# EAGLE board SparkFun_MicroMod_Function_ADIN1110-Panel_v10d (EAGLE 9.6.2), part 1 of 3
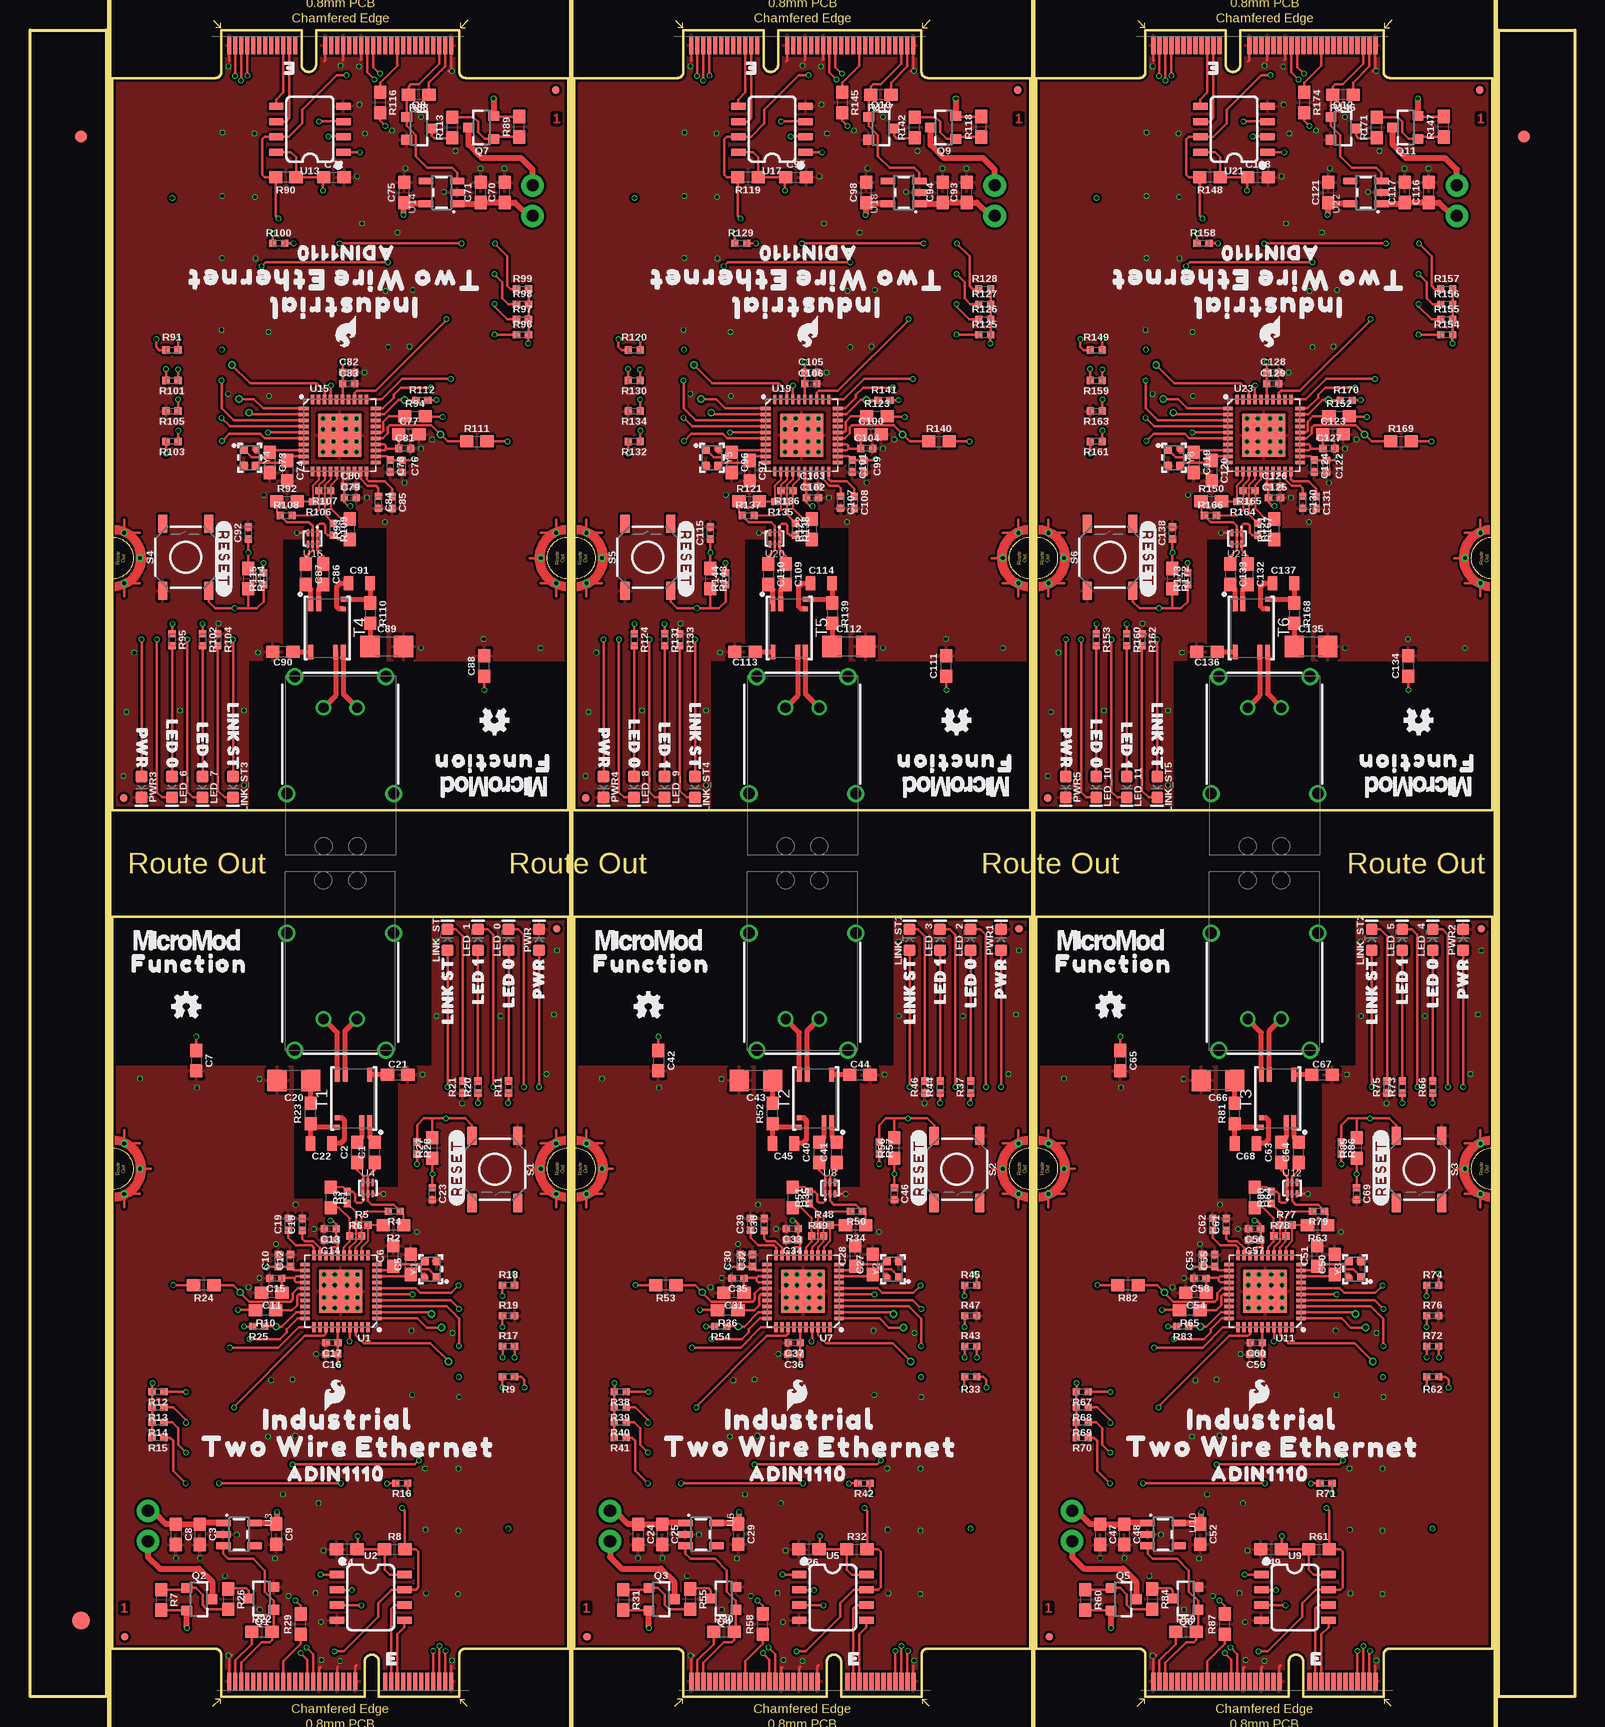
[diagram p0: board, top side]
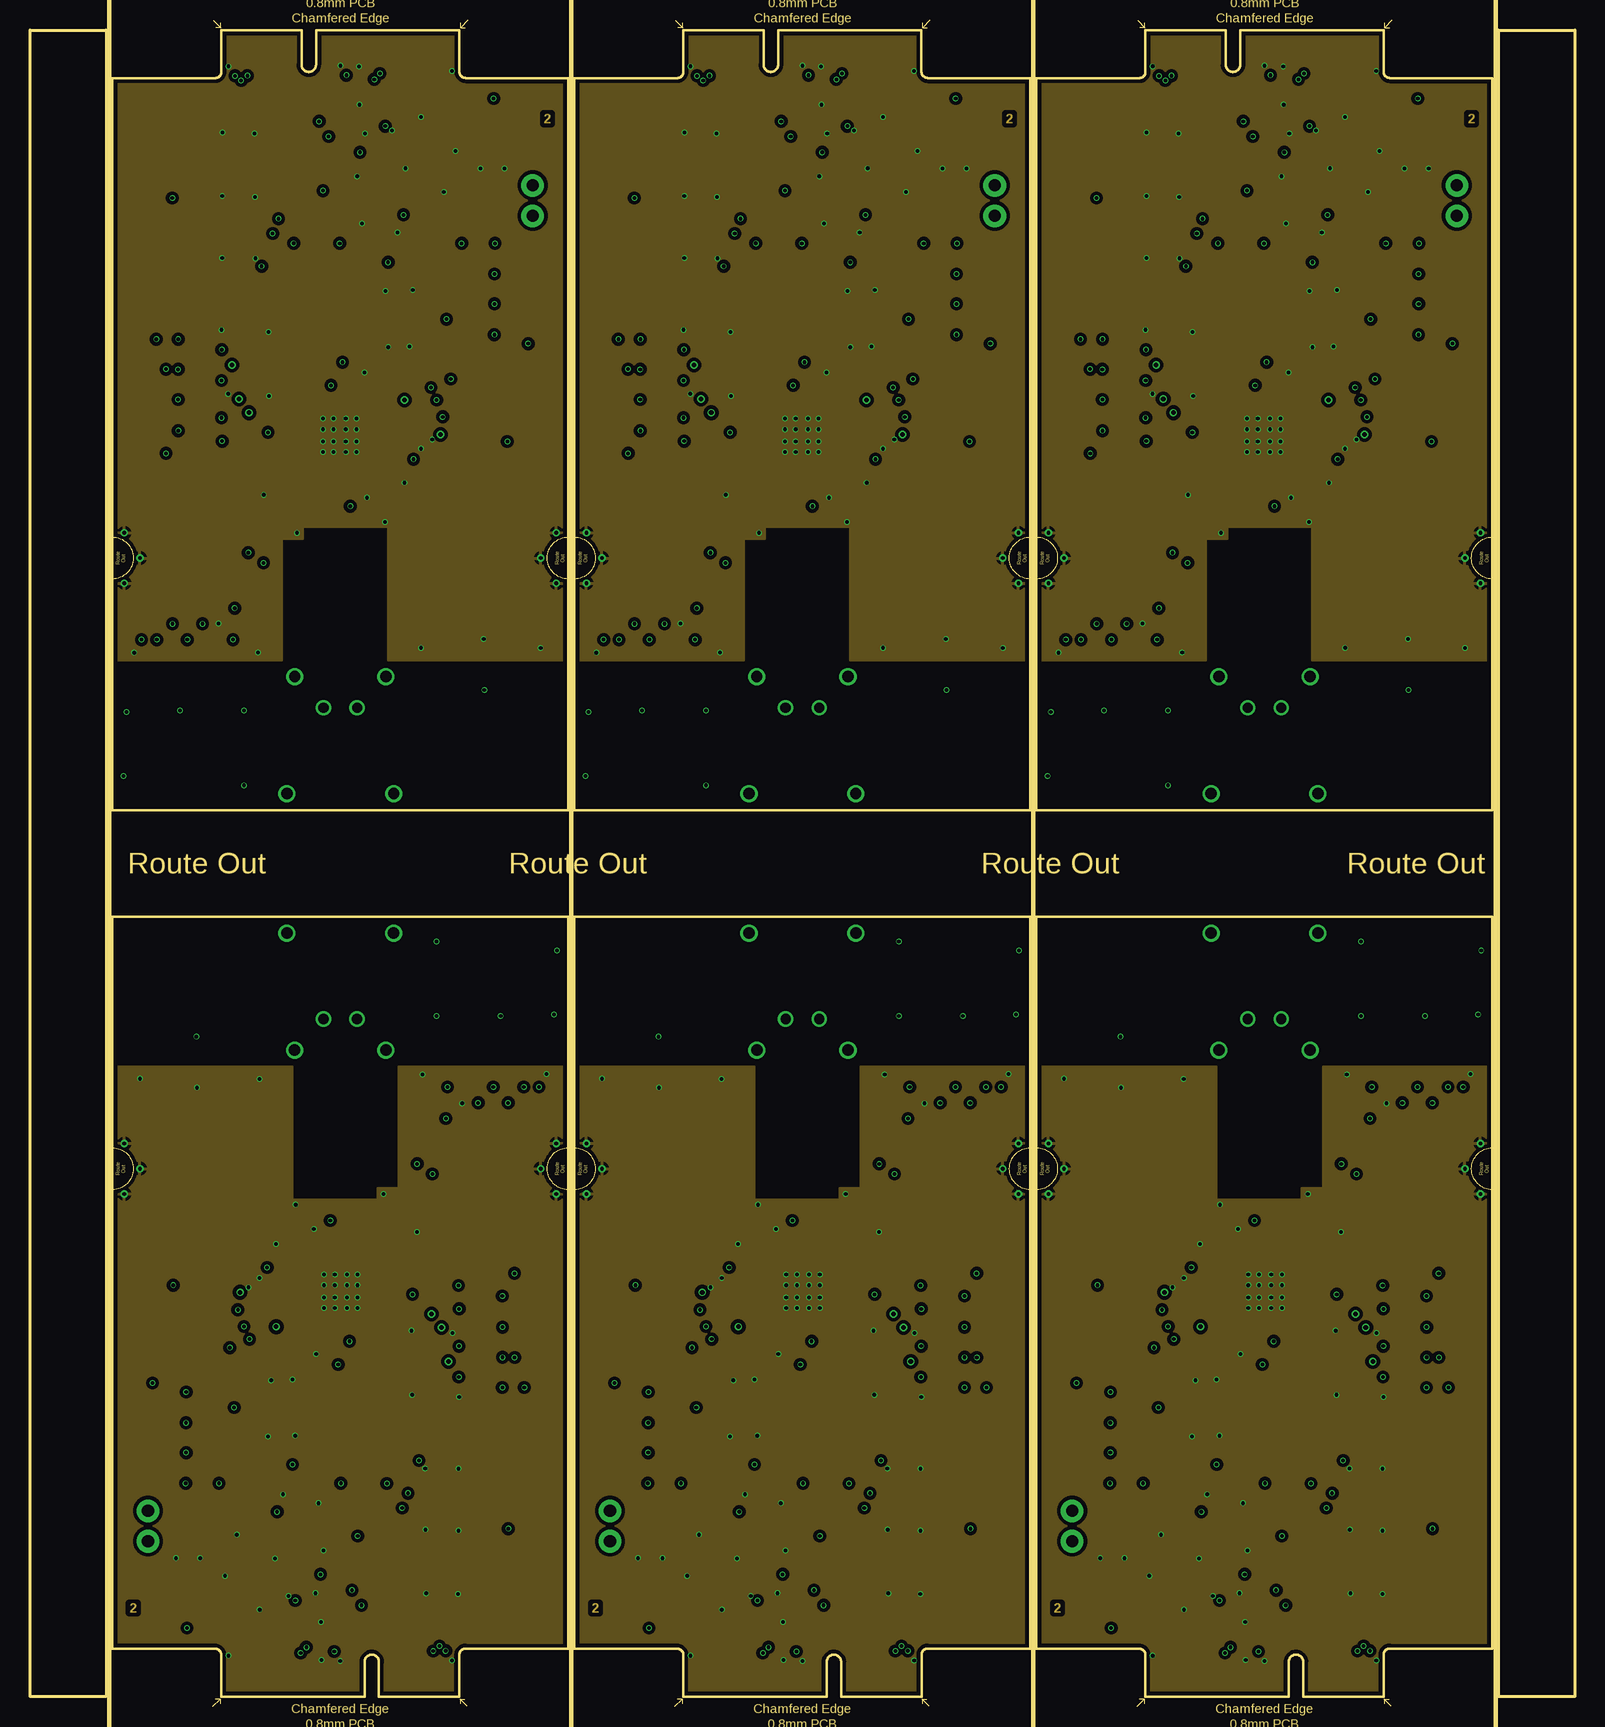
[diagram p1: board, inner layer Route2]
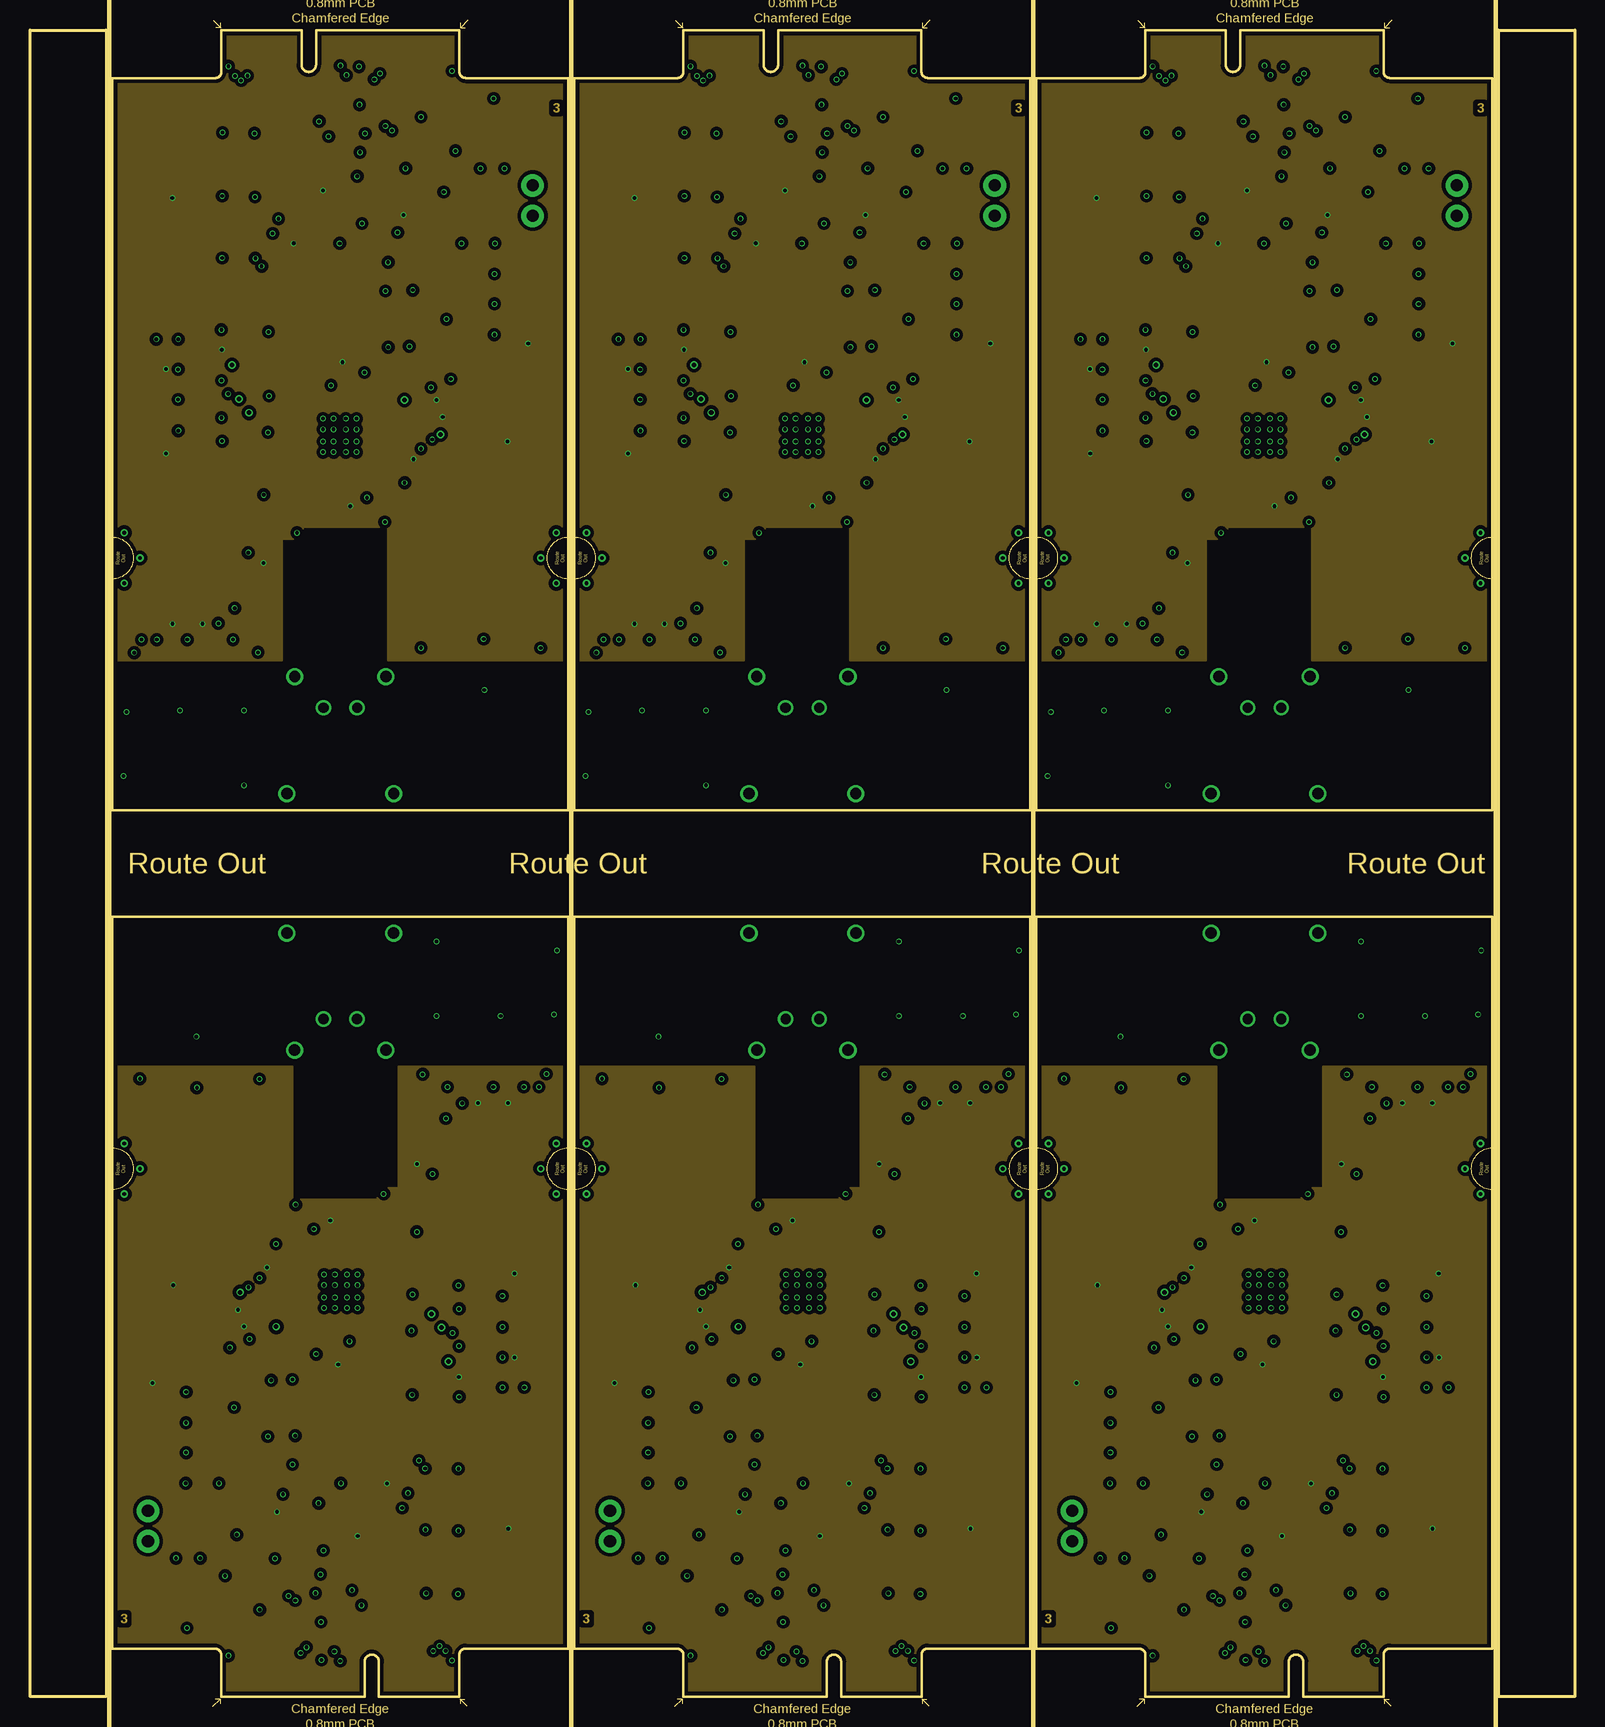
[diagram p2: board, inner layer Route15]
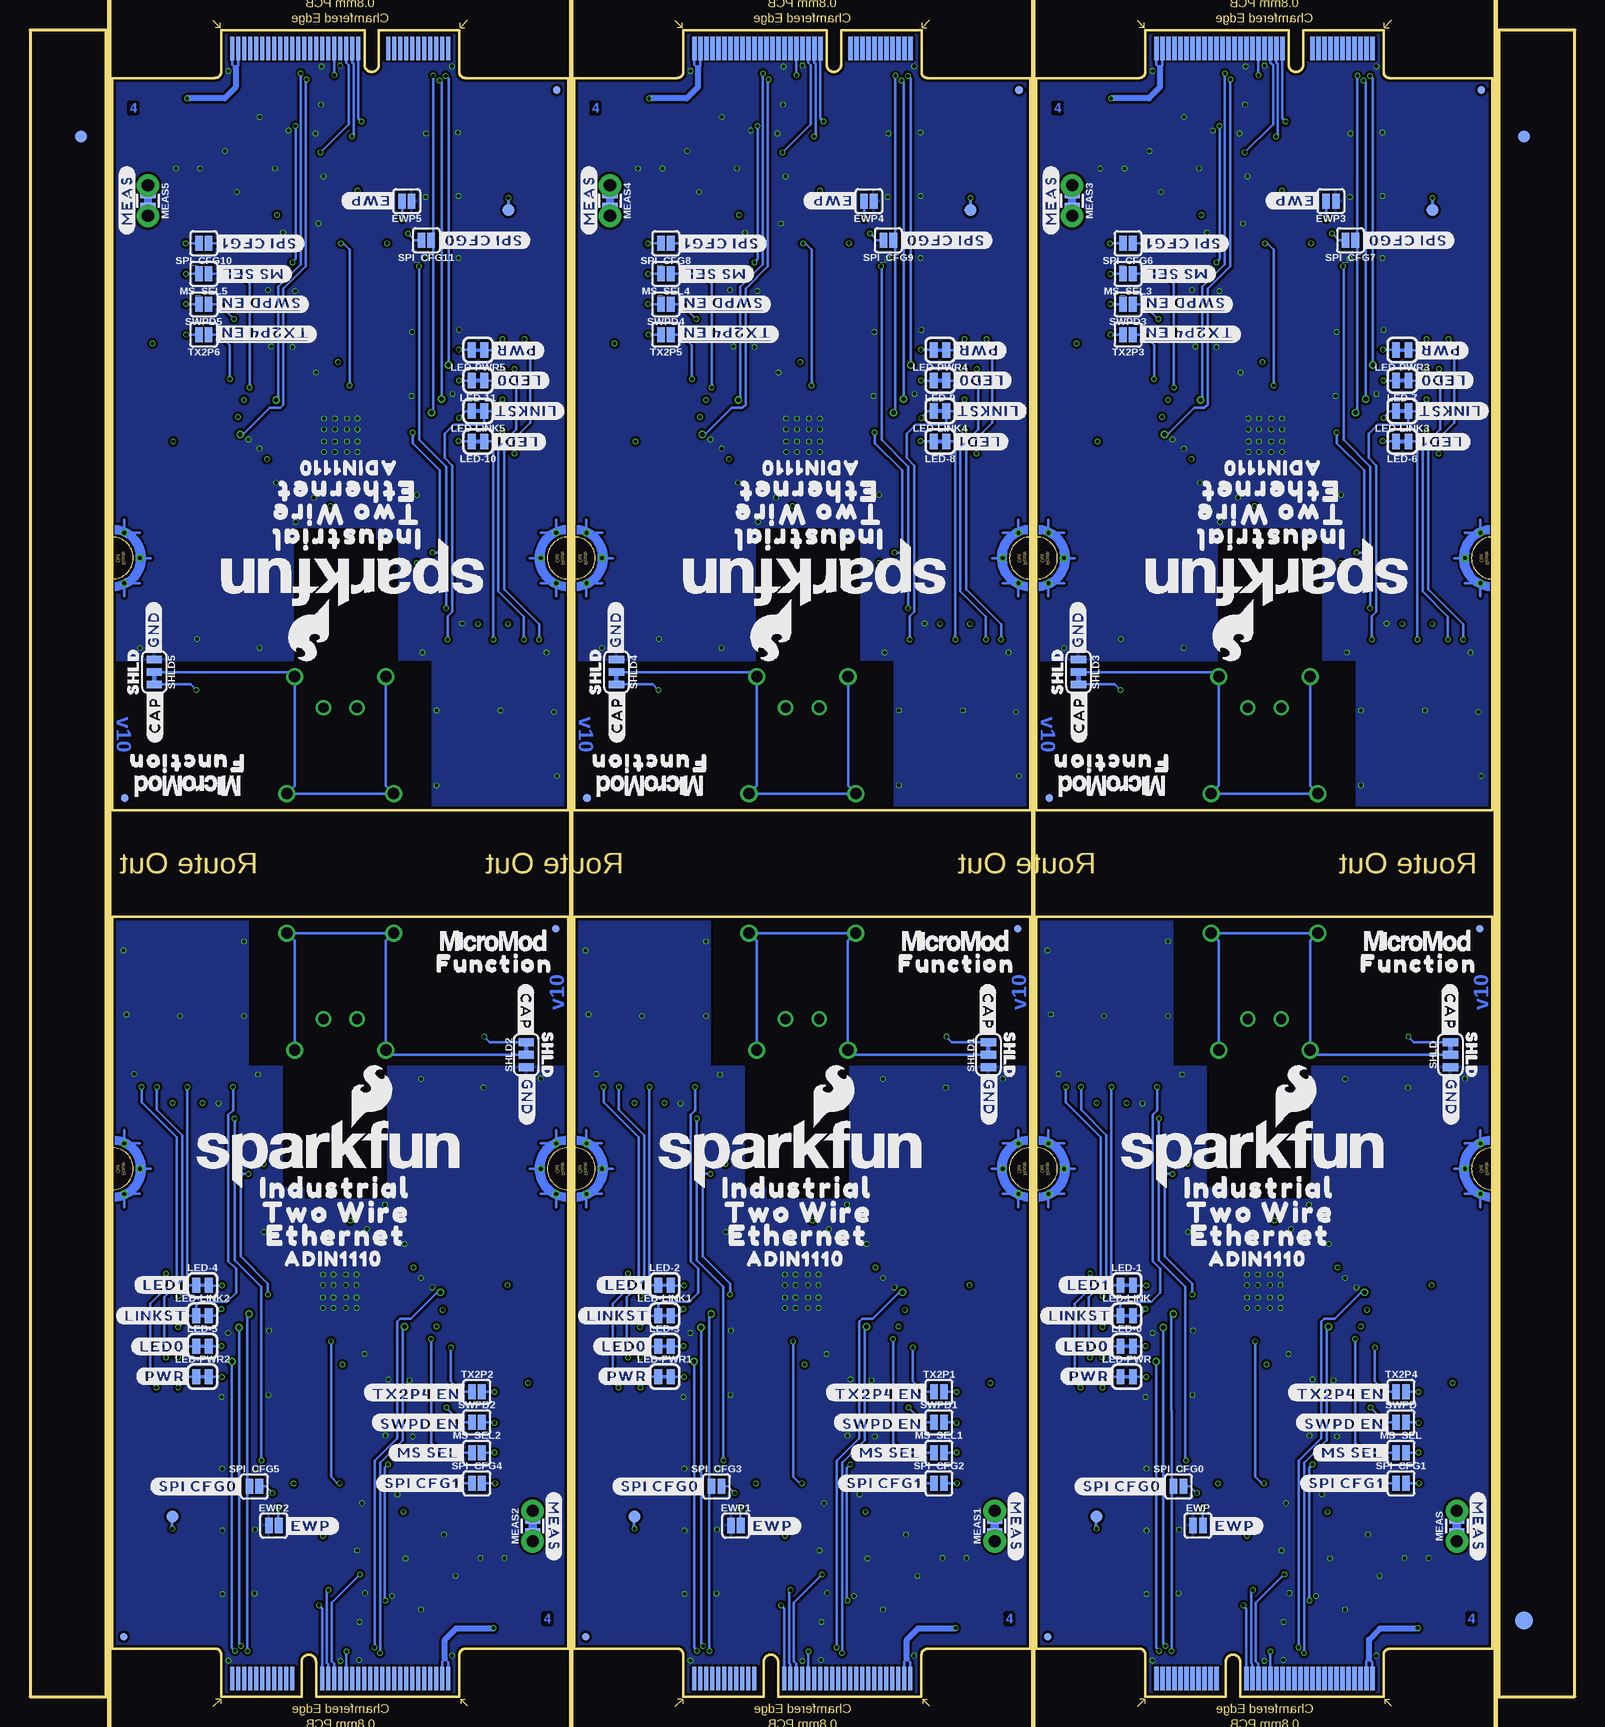
[diagram p3: board, bottom side, seen from below]

Size 128.73 x 138.89 mm. Coordinates in mm from the lower left corner, seen from the top.
Outline: 35.78,0 29.08,0 29.08,2.9 arc180 27.88,2.9 27.88,0 15.93,0 15.93,3.5 arc90 15.41,4 6.86,4 6.86,65 44.86,65 44.86,4 36.26,4 arc90 35.78,3.5 35.78,0
Outline: 74.29,0 67.59,0 67.59,2.9 arc180 66.39,2.9 66.39,0 54.44,0 54.44,3.5 arc90 53.92,4 45.37,4 45.37,65 83.37,65 83.37,4 74.77,4 arc90 74.29,3.5 74.29,0
Outline: 112.8,0 106.1,0 106.1,2.9 arc180 104.9,2.9 104.9,0 92.95,0 92.95,3.5 arc90 92.42,4 83.87,4 83.87,65 121.87,65 121.87,4 113.27,4 arc90 112.8,3.5 112.8,0
Outline: 15.93,138.89 22.63,138.89 22.63,135.99 arc180 23.83,135.99 23.83,138.89 35.78,138.89 35.78,135.39 arc90 36.31,134.89 44.86,134.89 44.86,73.89 6.86,73.89 6.86,134.89 15.46,134.89 arc90 15.93,135.39 15.93,138.89
Outline: 54.44,138.89 61.14,138.89 61.14,135.99 arc180 62.34,135.99 62.34,138.89 74.29,138.89 74.29,135.39 arc90 74.81,134.89 83.37,134.89 83.37,73.89 45.36,73.89 45.36,134.89 53.96,134.89 arc90 54.44,135.39 54.44,138.89
Outline: 92.95,138.89 99.65,138.89 99.65,135.99 arc180 100.85,135.99 100.85,138.89 112.8,138.89 112.8,135.39 arc90 113.32,134.89 121.87,134.89 121.87,73.89 83.87,73.89 83.87,134.89 92.47,134.89 arc90 92.95,135.39 92.95,138.89
Outline: 122.38,138.89 128.73,138.89 128.73,0 122.38,0 122.38,138.89
Outline: 0,138.89 6.35,138.89 6.35,0 0,0 0,138.89
Copper layers (1+2*15+16): Top 0.035mm / dielectric 1.5mm / Route2 0.035mm / dielectric 0.15mm / Route15 0.035mm / dielectric 0.2mm / Bottom 0.035mm
Design rules "SparkFun_MicroMod_Function_ADIN1110": minimum track width 4mil, minimum drill 0.2mm, track to track 4mil, track to pad 4mil, pad to pad 4mil, via to via 4mil, smd to smd 4mil, copper to edge 6mil, drill to drill 6mil, minimum pad ring 3mil, minimum via ring 3mil, stop-mask expansion 2.5mil, vias tented up to drill 25mil, thermal gap 10mil
Net classes: 0 default: width 0 mm, drill 0 mm
Milling: 4 lines

## Footprints (pad centres in the part's own frame; a part is rotated, then mirrored left to right if it is on the bottom)
0603 = smd 1.1 x 1: 1 -0.85,0; 2 0.85,0
0402-TIGHT = smd 0.6 x 0.6: 1 -0.5,0; 2 0.5,0
1206 = smd 1.6 x 1.8: 1 -1.4,0; 2 1.4,0
0805 = smd 0.8 x 1.2: 1 -0.9,0; 2 0.9,0
TP_15TH = drill 0.381 pad 0.61: 1 0,0
FIDUCIAL-1X2 = smd 1 x 1: 1 0,0
FIDUCIAL-1.5X3 = smd 1.5 x 1.5: 1 0,0
SMT-JUMPER_2_NO_SILK = smd 0.635 x 1.27: 1 -0.406,0; 2 0.406,0
FIDUCIAL-MICRO = smd 0.635 x 0.635: 1 0,0
T1_INDUSTRIAL_JACK_AH_IP20 = drill 0.85 pad 1.25: 1 1.4,8.52; 2 -1.4,8.52 | drill 0.95 pad 1.35: S1 -3.8,11.12; S2 3.8,11.12; S3 4.45,1.37; S4 -4.45,1.37
M.2-CARD-E-22_FUNCTION_STANDARD = smd 0.35 x 1.45: 1 9.25,1.275; 3 8.75,1.275; 5 8.25,1.275; 7 7.75,1.275; 9 7.25,1.275; 11 6.75,1.275; 13 6.25,1.275; 15 5.75,1.275; 17 5.25,1.275; 19 4.75,1.275; 21 4.25,1.275; 23 3.75,1.275; 33 1.25,1.275; 35 0.75,1.275; 37 0.25,1.275; 39 -0.25,1.275; 41 -0.75,1.275; 43 -1.25,1.275; 45 -1.75,1.275; 47 -2.25,1.275; 49 -2.75,1.275; 51 -3.25,1.275; 53 -3.75,1.275; 55 -4.25,1.275; 57 -4.75,1.275; 59 -5.25,1.275; 61 -5.75,1.275; 63 -6.25,1.275; 65 -6.75,1.275; 67 -7.25,1.275; 69 -7.75,1.275; 71 -8.25,1.275; 73 -8.75,1.275; 75 -9.25,1.275 | smd 0.35 x 1.95 bottom: 2 9,1.525; 4 8.5,1.525; 6 8,1.525; 8 7.5,1.525; 10 7,1.525; 12 6.5,1.525; 14 6,1.525; 16 5.5,1.525; 18 5,1.525; 20 4.5,1.525; 22 4,1.525; 32 1.5,1.525; 34 1,1.525; 36 0.5,1.525; 38 0,1.525; 40 -0.5,1.525; 42 -1,1.525; 44 -1.5,1.525; 46 -2,1.525; 48 -2.5,1.525; 50 -3,1.525; 52 -3.5,1.525; 54 -4,1.525; 56 -4.5,1.525; 58 -5,1.525; 60 -5.5,1.525; 62 -6,1.525; 64 -6.5,1.525; 66 -7,1.525; 68 -7.5,1.525; 70 -8,1.525; 72 -8.5,1.525; 74 -9,1.525 | drill 0.305 pad 0.61: GND1 -18,41.9; GND2 -16.7,44; GND3 -18,46.1; GND4 18,41.9; GND5 16.7,44; GND6 18,46.1
SMT-JUMPER_2_NC_TRACE_SILK = smd 0.66 x 1.27: 1 -0.521,0; 2 0.521,0
LED-0603 = smd 1 x 1: A -0.877,0; C 0.877,0
COMBO-JUMPER_2_NC_TRACE = smd 0.635 x 1.27: 1 -0.508,0; 2 0.508,0 | drill 1.016 pad 1.88: 3 -1.27,0; 4 1.27,0
SOT23-3 = smd 0.8 x 0.9: 1 -0.95,-1; 2 0.95,-1; 3 0,1.1
TACTILE_SWITCH_SMD_5.2MM = smd 1.524 x 0.762: 1 -2.794,1.905; 2 2.794,1.905; 3 -2.794,-1.905; 4 2.794,-1.905
SMT-JUMPER_3_1-NC_TRACE_SILK = smd 0.66 x 1.27: 1 -1.041,0; 2 0,0; 3 1.041,0
WE_STST_TRANSFORMER_1:1_SMD_3.2X4.7MM_74930030 = smd 1.2 x 0.41: 1 -1.99,-1.35; 2 -1.99,-0.7; 5 1.99,-1.35; 6 1.99,0.7; 7 1.99,1.35 | smd 0.4 x 0.41: 3 -2.39,1.35; 4 -1.59,1.35
PAD.03X.04 = smd 1.016 x 1.016: 1 0,0
LFCSP-40 = smd 0.8 x 0.285: 1 -3,2.25; 2 -3,1.75; 3 -3,1.25; 4 -3,0.75; 5 -3,0.25; 6 -3,-0.25; 7 -3,-0.75; 8 -3,-1.25; 9 -3,-1.75; 10 -3,-2.25; 21 3,-2.25; 22 3,-1.75; 23 3,-1.25; 24 3,-0.75; 25 3,-0.25; 26 3,0.25; 27 3,0.75; 28 3,1.25; 29 3,1.75; 30 3,2.25 | smd 0.285 x 0.8: 11 -2.25,-3; 12 -1.75,-3; 13 -1.25,-3; 14 -0.75,-3; 15 -0.25,-3; 16 0.25,-3; 17 0.75,-3; 18 1.25,-3; 19 1.75,-3; 20 2.25,-3; 31 2.25,3; 32 1.75,3; 33 1.25,3; 34 0.75,3; 35 0.25,3; 36 -0.25,3; 37 -0.75,3; 38 -1.25,3; 39 -1.75,3; 40 -2.25,3 | smd 3.6 x 3.6: EP 0,0
SO08 = smd 0.6 x 1.2: 1 -1.905,-2.8; 2 -0.635,-2.8; 3 0.635,-2.8; 4 1.905,-2.8; 5 1.905,2.8; 6 0.635,2.8; 7 -0.635,2.8; 8 -1.905,2.8
SOT23-5 = smd 0.55 x 1.2: 1 -0.95,-1.3; 2 0,-1.3; 3 0.95,-1.3; 4 0.95,1.3; 5 -0.95,1.3
WE_TVS_1.0X1.2MM = smd 0.2 x 0.6: 1 -0.4,-0.475; 2 0,-0.475; 3 0.4,-0.475; 4 0.4,0.475; 5 0,0.475; 6 -0.4,0.475
CRYSTAL-SMD-2.0X1.6MM-WE = smd 0.75 x 0.7: 1 -0.675,-0.5; 2 0.675,-0.5; 3 0.675,0.5 | smd 0.381 x 0.381: 4 -0.675,0.5

## Placement (x,y rotation side)
C1  0.22uF  [0603]  28.72,45.36 90 top
C2  0.22uF  [0603]  27.26,45.36 90 top
C3  0.1uF  [0603]  14.16,13.53 270 top
C4  0.1uF  [0603]  26.4,12.27 180 top
C5  10pF  [0603]  31.73,36.03 90 top
C6  10pF  [0603]  30.26,36.72 90 top
C7  3.3nF  [0603]  13.86,53 270 top
C8  1.0uF  [0603]  12.16,13.53 270 top
C9  1.0uF  [0603]  20.53,13.54 270 top
C10  0.1uF  [0402-TIGHT]  20.69,36.35 90 top
C11  0.68uF  [0603]  20.14,33.67 180 top
C12  10nF  [0402-TIGHT]  21.71,36.34 90 top
C13  0.1uF  [0402-TIGHT]  25.02,38.99 180 top
C14  10nF  [0402-TIGHT]  25.03,38.03 180 top
C15  0.1uF  [0402-TIGHT]  20.49,34.87 180 top
C16  0.1uF  [0402-TIGHT]  25.15,28.53 180 top
C17  10nF  [0402-TIGHT]  25.17,29.49 180 top
C18  0.1uF  [0402-TIGHT]  22.68,39.35 90 top
C19  1.0uF  [0402-TIGHT]  21.54,39.37 90 top
C20  1.0nF/2kV  [1206]  21.99,51.36 180 top
C21  0.1uF/50V  [0603]  30.65,51.82 0 top
C22  470nF/100V  [0805]  24.28,46.1 180 top
C23  0.1uF  [0402-TIGHT]  33.53,41.91 270 top
C24  1.0uF  [0603]  50.67,13.53 270 top
C25  0.1uF  [0603]  52.67,13.53 270 top
C26  0.1uF  [0603]  64.91,12.27 180 top
C27  10pF  [0603]  70.24,36.03 90 top
C28  10pF  [0603]  68.77,36.72 90 top
C29  1.0uF  [0603]  59.03,13.54 270 top
C30  0.1uF  [0402-TIGHT]  59.2,36.35 90 top
C31  0.68uF  [0603]  58.65,33.67 180 top
C32  10nF  [0402-TIGHT]  60.22,36.34 90 top
C33  0.1uF  [0402-TIGHT]  63.53,38.99 180 top
C34  10nF  [0402-TIGHT]  63.54,38.03 180 top
C35  0.1uF  [0402-TIGHT]  59,34.87 180 top
C36  0.1uF  [0402-TIGHT]  63.66,28.53 180 top
C37  10nF  [0402-TIGHT]  63.68,29.49 180 top
C38  0.1uF  [0402-TIGHT]  61.19,39.35 90 top
C39  1.0uF  [0402-TIGHT]  60.05,39.37 90 top
C40  0.22uF  [0603]  65.77,45.36 90 top
C41  0.22uF  [0603]  67.23,45.36 90 top
C42  3.3nF  [0603]  52.37,53 270 top
C43  1.0nF/2kV  [1206]  60.5,51.36 180 top
C44  0.1uF/50V  [0603]  69.16,51.82 0 top
C45  470nF/100V  [0805]  62.79,46.1 180 top
C46  0.1uF  [0402-TIGHT]  72.04,41.91 270 top
C47  1.0uF  [0603]  89.17,13.53 270 top
C48  0.1uF  [0603]  91.17,13.53 270 top
C49  0.1uF  [0603]  103.41,12.27 180 top
C50  10pF  [0603]  108.75,36.03 90 top
C51  10pF  [0603]  107.28,36.72 90 top
C52  1.0uF  [0603]  97.54,13.54 270 top
C53  0.1uF  [0402-TIGHT]  97.71,36.35 90 top
C54  0.68uF  [0603]  97.16,33.67 180 top
C55  10nF  [0402-TIGHT]  98.72,36.34 90 top
C56  0.1uF  [0402-TIGHT]  102.03,38.99 180 top
C57  10nF  [0402-TIGHT]  102.04,38.03 180 top
C58  0.1uF  [0402-TIGHT]  97.5,34.87 180 top
C59  0.1uF  [0402-TIGHT]  102.17,28.53 180 top
C60  10nF  [0402-TIGHT]  102.18,29.49 180 top
C61  0.1uF  [0402-TIGHT]  99.7,39.35 90 top
C62  1.0uF  [0402-TIGHT]  98.55,39.37 90 top
C63  0.22uF  [0603]  104.28,45.36 90 top
C64  0.22uF  [0603]  105.74,45.36 90 top
C65  3.3nF  [0603]  90.87,53 270 top
C66  1.0nF/2kV  [1206]  99,51.36 180 top
C67  0.1uF/50V  [0603]  107.66,51.82 0 top
C68  470nF/100V  [0805]  101.3,46.1 180 top
C69  0.1uF  [0402-TIGHT]  110.54,41.91 270 top
C70  1.0uF  [0603]  39.56,125.36 90 top
C71  0.1uF  [0603]  37.56,125.36 90 top
C72  0.1uF  [0603]  25.32,126.62 0 top
C73  10pF  [0603]  19.98,102.86 270 top
C74  10pF  [0603]  21.45,102.17 270 top
C75  1.0uF  [0603]  31.19,125.35 90 top
C76  0.1uF  [0402-TIGHT]  31.03,102.54 270 top
C77  0.68uF  [0603]  31.57,105.22 0 top
C78  10nF  [0402-TIGHT]  30.01,102.55 270 top
C79  0.1uF  [0402-TIGHT]  26.7,99.9 0 top
C80  10nF  [0402-TIGHT]  26.69,100.86 0 top
C81  0.1uF  [0402-TIGHT]  31.23,104.02 0 top
C82  0.1uF  [0402-TIGHT]  26.57,110.36 0 top
C83  10nF  [0402-TIGHT]  26.55,109.4 0 top
C84  0.1uF  [0402-TIGHT]  29.04,99.54 270 top
C85  1.0uF  [0402-TIGHT]  30.18,99.52 270 top
C86  0.22uF  [0603]  24.46,93.53 270 top
C87  0.22uF  [0603]  23,93.53 270 top
C88  3.3nF  [0603]  37.86,85.89 90 top
C89  1.0nF/2kV  [1206]  29.73,87.53 0 top
C90  0.1uF/50V  [0603]  21.07,87.07 180 top
C91  470nF/100V  [0805]  27.44,92.79 0 top
C92  0.1uF  [0402-TIGHT]  18.19,96.98 90 top
C93  1.0uF  [0603]  78.06,125.36 90 top
C94  0.1uF  [0603]  76.06,125.36 90 top
C95  0.1uF  [0603]  63.83,126.62 0 top
C96  10pF  [0603]  58.49,102.86 270 top
C97  10pF  [0603]  59.96,102.17 270 top
C98  1.0uF  [0603]  69.7,125.35 90 top
C99  0.1uF  [0402-TIGHT]  69.53,102.54 270 top
C100  0.68uF  [0603]  70.08,105.22 0 top
C101  10nF  [0402-TIGHT]  68.52,102.55 270 top
C102  0.1uF  [0402-TIGHT]  65.2,99.9 0 top
C103  10nF  [0402-TIGHT]  65.19,100.86 0 top
C104  0.1uF  [0402-TIGHT]  69.74,104.02 0 top
C105  0.1uF  [0402-TIGHT]  65.07,110.36 0 top
C106  10nF  [0402-TIGHT]  65.06,109.4 0 top
C107  0.1uF  [0402-TIGHT]  67.54,99.54 270 top
C108  1.0uF  [0402-TIGHT]  68.69,99.52 270 top
C109  0.22uF  [0603]  62.96,93.53 270 top
C110  0.22uF  [0603]  61.5,93.53 270 top
C111  3.3nF  [0603]  76.37,85.89 90 top
C112  1.0nF/2kV  [1206]  68.23,87.53 0 top
C113  0.1uF/50V  [0603]  59.58,87.07 180 top
C114  470nF/100V  [0805]  65.94,92.79 0 top
C115  0.1uF  [0402-TIGHT]  56.7,96.98 90 top
C116  1.0uF  [0603]  116.57,125.36 90 top
C117  0.1uF  [0603]  114.57,125.36 90 top
C118  0.1uF  [0603]  102.33,126.62 0 top
C119  10pF  [0603]  97,102.86 270 top
C120  10pF  [0603]  98.47,102.17 270 top
C121  1.0uF  [0603]  108.21,125.35 90 top
C122  0.1uF  [0402-TIGHT]  108.04,102.54 270 top
C123  0.68uF  [0603]  108.59,105.22 0 top
C124  10nF  [0402-TIGHT]  107.03,102.55 270 top
C125  0.1uF  [0402-TIGHT]  103.71,99.9 0 top
C126  10nF  [0402-TIGHT]  103.7,100.86 0 top
C127  0.1uF  [0402-TIGHT]  108.24,104.02 0 top
C128  0.1uF  [0402-TIGHT]  103.58,110.36 0 top
C129  10nF  [0402-TIGHT]  103.57,109.4 0 top
C130  0.1uF  [0402-TIGHT]  106.05,99.54 270 top
C131  1.0uF  [0402-TIGHT]  107.2,99.52 270 top
C132  0.22uF  [0603]  101.47,93.53 270 top
C133  0.22uF  [0603]  100.01,93.53 270 top
C134  3.3nF  [0603]  114.87,85.89 90 top
C135  1.0nF/2kV  [1206]  106.74,87.53 0 top
C136  0.1uF/50V  [0603]  98.08,87.07 180 top
C137  470nF/100V  [0805]  104.45,92.79 0 top
C138  0.1uF  [0402-TIGHT]  95.2,96.98 90 top
CIPO  [TP_15TH]  33.45,31.89 0 top
CIPO1  [TP_15TH]  71.96,31.89 0 top
CIPO2  [TP_15TH]  110.47,31.89 0 top
CIPO3  [TP_15TH]  18.26,107 180 top
CIPO4  [TP_15TH]  56.77,107 180 top
CIPO5  [TP_15TH]  95.28,107 180 top
COPI  [TP_15TH]  34.3,30.76 0 top
COPI1  [TP_15TH]  72.8,30.76 0 top
COPI2  [TP_15TH]  111.31,30.76 0 top
COPI3  [TP_15TH]  17.42,108.13 180 top
COPI4  [TP_15TH]  55.93,108.13 180 top
COPI5  [TP_15TH]  94.44,108.13 180 top
CS  [TP_15TH]  20.52,30.83 0 top
CS1  [TP_15TH]  59.02,30.83 0 top
CS2  [TP_15TH]  97.53,30.83 0 top
CS3  [TP_15TH]  31.2,108.06 180 top
CS4  [TP_15TH]  69.71,108.06 180 top
CS5  [TP_15TH]  108.22,108.06 180 top
E$1  [FIDUCIAL-1X2]  4.23,130 0 top
E$2  [FIDUCIAL-1X2]  4.23,130 0 bottom
E$3  [FIDUCIAL-1X2]  124.5,130 0 top
E$4  [FIDUCIAL-1X2]  124.5,130 0 bottom
E$5  [FIDUCIAL-1.5X3]  4.23,6.35 0 top
E$6  [FIDUCIAL-1.5X3]  4.23,6.35 0 bottom
EWP  JUMPER-SMT_2_NO_SILK  [SMT-JUMPER_2_NO_SILK]  31.4,14.27 0 bottom
EWP1  JUMPER-SMT_2_NO_SILK  [SMT-JUMPER_2_NO_SILK]  69.91,14.27 0 bottom
EWP2  JUMPER-SMT_2_NO_SILK  [SMT-JUMPER_2_NO_SILK]  108.41,14.27 0 bottom
EWP3  JUMPER-SMT_2_NO_SILK  [SMT-JUMPER_2_NO_SILK]  20.32,124.62 180 bottom
EWP4  JUMPER-SMT_2_NO_SILK  [SMT-JUMPER_2_NO_SILK]  58.83,124.62 180 bottom
EWP5  JUMPER-SMT_2_NO_SILK  [SMT-JUMPER_2_NO_SILK]  97.33,124.62 180 bottom
FD1  FIDUCIALUFIDUCIAL  [FIDUCIAL-MICRO]  7.91,5 90 top
FD2  FIDUCIALUFIDUCIAL  [FIDUCIAL-MICRO]  43.91,64 90 top
FD3  FIDUCIALUFIDUCIAL  [FIDUCIAL-MICRO]  43.91,5 270 bottom
FD4  FIDUCIALUFIDUCIAL  [FIDUCIAL-MICRO]  7.91,64 270 bottom
FD5  FIDUCIALUFIDUCIAL  [FIDUCIAL-MICRO]  46.42,5 90 top
FD6  FIDUCIALUFIDUCIAL  [FIDUCIAL-MICRO]  82.42,64 90 top
FD7  FIDUCIALUFIDUCIAL  [FIDUCIAL-MICRO]  82.42,5 270 bottom
FD8  FIDUCIALUFIDUCIAL  [FIDUCIAL-MICRO]  46.42,64 270 bottom
FD9  FIDUCIALUFIDUCIAL  [FIDUCIAL-MICRO]  84.92,5 90 top
FD10  FIDUCIALUFIDUCIAL  [FIDUCIAL-MICRO]  120.92,64 90 top
FD11  FIDUCIALUFIDUCIAL  [FIDUCIAL-MICRO]  120.92,5 270 bottom
FD12  FIDUCIALUFIDUCIAL  [FIDUCIAL-MICRO]  84.92,64 270 bottom
FD13  FIDUCIALUFIDUCIAL  [FIDUCIAL-MICRO]  43.81,133.89 270 top
FD14  FIDUCIALUFIDUCIAL  [FIDUCIAL-MICRO]  7.81,74.89 270 top
FD15  FIDUCIALUFIDUCIAL  [FIDUCIAL-MICRO]  7.81,133.89 90 bottom
FD16  FIDUCIALUFIDUCIAL  [FIDUCIAL-MICRO]  43.81,74.89 90 bottom
FD17  FIDUCIALUFIDUCIAL  [FIDUCIAL-MICRO]  82.32,133.89 270 top
FD18  FIDUCIALUFIDUCIAL  [FIDUCIAL-MICRO]  46.32,74.89 270 top
FD19  FIDUCIALUFIDUCIAL  [FIDUCIAL-MICRO]  46.32,133.89 90 bottom
FD20  FIDUCIALUFIDUCIAL  [FIDUCIAL-MICRO]  82.32,74.89 90 bottom
FD21  FIDUCIALUFIDUCIAL  [FIDUCIAL-MICRO]  120.82,133.89 270 top
FD22  FIDUCIALUFIDUCIAL  [FIDUCIAL-MICRO]  84.82,74.89 270 top
FD23  FIDUCIALUFIDUCIAL  [FIDUCIAL-MICRO]  84.82,133.89 90 bottom
FD24  FIDUCIALUFIDUCIAL  [FIDUCIAL-MICRO]  120.82,74.89 90 bottom
INT  [TP_15TH]  17.51,33.7 0 top
INT1  [TP_15TH]  56.02,33.7 0 top
INT2  [TP_15TH]  94.53,33.7 0 top
INT3  [TP_15TH]  34.2,105.19 180 top
INT4  [TP_15TH]  72.71,105.19 180 top
INT5  [TP_15TH]  111.22,105.19 180 top
J1  IP20(RJ50)  [T1_INDUSTRIAL_JACK_AH_IP20]  25.86,65 180 top
J2  MICROMOD_FUNCTION_STANDARD  [M.2-CARD-E-22_FUNCTION_STANDARD]  25.86,0 0 top
J3  MICROMOD_FUNCTION_STANDARD  [M.2-CARD-E-22_FUNCTION_STANDARD]  64.37,0 0 top
J4  IP20(RJ50)  [T1_INDUSTRIAL_JACK_AH_IP20]  64.37,65 180 top
J5  MICROMOD_FUNCTION_STANDARD  [M.2-CARD-E-22_FUNCTION_STANDARD]  102.87,0 0 top
J6  IP20(RJ50)  [T1_INDUSTRIAL_JACK_AH_IP20]  102.87,65 180 top
J7  MICROMOD_FUNCTION_STANDARD  [M.2-CARD-E-22_FUNCTION_STANDARD]  25.86,138.89 180 top
J8  IP20(RJ50)  [T1_INDUSTRIAL_JACK_AH_IP20]  25.86,73.89 0 top
J9  MICROMOD_FUNCTION_STANDARD  [M.2-CARD-E-22_FUNCTION_STANDARD]  64.37,138.89 180 top
J10  IP20(RJ50)  [T1_INDUSTRIAL_JACK_AH_IP20]  64.37,73.89 0 top
J11  MICROMOD_FUNCTION_STANDARD  [M.2-CARD-E-22_FUNCTION_STANDARD]  102.87,138.89 180 top
J12  IP20(RJ50)  [T1_INDUSTRIAL_JACK_AH_IP20]  102.87,73.89 0 top
LED-0  JUMPER-SMT_2_NC_TRACE_SILK  [SMT-JUMPER_2_NC_TRACE_SILK]  37.34,29.21 0 bottom
LED-1  JUMPER-SMT_2_NC_TRACE_SILK  [SMT-JUMPER_2_NC_TRACE_SILK]  37.34,34.29 0 bottom
LED-2  JUMPER-SMT_2_NC_TRACE_SILK  [SMT-JUMPER_2_NC_TRACE_SILK]  75.85,34.29 0 bottom
LED-3  JUMPER-SMT_2_NC_TRACE_SILK  [SMT-JUMPER_2_NC_TRACE_SILK]  75.85,29.21 0 bottom
LED-4  JUMPER-SMT_2_NC_TRACE_SILK  [SMT-JUMPER_2_NC_TRACE_SILK]  114.35,34.29 0 bottom
LED-5  JUMPER-SMT_2_NC_TRACE_SILK  [SMT-JUMPER_2_NC_TRACE_SILK]  114.35,29.21 0 bottom
LED-6  JUMPER-SMT_2_NC_TRACE_SILK  [SMT-JUMPER_2_NC_TRACE_SILK]  14.38,104.6 180 bottom
LED-7  JUMPER-SMT_2_NC_TRACE_SILK  [SMT-JUMPER_2_NC_TRACE_SILK]  14.38,109.68 180 bottom
LED-8  JUMPER-SMT_2_NC_TRACE_SILK  [SMT-JUMPER_2_NC_TRACE_SILK]  52.89,104.6 180 bottom
LED-9  JUMPER-SMT_2_NC_TRACE_SILK  [SMT-JUMPER_2_NC_TRACE_SILK]  52.89,109.68 180 bottom
LED-10  JUMPER-SMT_2_NC_TRACE_SILK  [SMT-JUMPER_2_NC_TRACE_SILK]  91.39,104.6 180 bottom
LED-11  JUMPER-SMT_2_NC_TRACE_SILK  [SMT-JUMPER_2_NC_TRACE_SILK]  91.39,109.68 180 bottom
LED-LINK  JUMPER-SMT_2_NC_TRACE_SILK  [SMT-JUMPER_2_NC_TRACE_SILK]  37.34,31.75 0 bottom
LED-LINK1  JUMPER-SMT_2_NC_TRACE_SILK  [SMT-JUMPER_2_NC_TRACE_SILK]  75.85,31.75 0 bottom
LED-LINK2  JUMPER-SMT_2_NC_TRACE_SILK  [SMT-JUMPER_2_NC_TRACE_SILK]  114.35,31.75 0 bottom
LED-LINK3  JUMPER-SMT_2_NC_TRACE_SILK  [SMT-JUMPER_2_NC_TRACE_SILK]  14.38,107.14 180 bottom
LED-LINK4  JUMPER-SMT_2_NC_TRACE_SILK  [SMT-JUMPER_2_NC_TRACE_SILK]  52.89,107.14 180 bottom
LED-LINK5  JUMPER-SMT_2_NC_TRACE_SILK  [SMT-JUMPER_2_NC_TRACE_SILK]  91.39,107.14 180 bottom
LED-PWR  JUMPER-SMT_2_NC_TRACE_SILK  [SMT-JUMPER_2_NC_TRACE_SILK]  37.34,26.67 0 bottom
LED-PWR1  JUMPER-SMT_2_NC_TRACE_SILK  [SMT-JUMPER_2_NC_TRACE_SILK]  75.85,26.67 0 bottom
LED-PWR2  JUMPER-SMT_2_NC_TRACE_SILK  [SMT-JUMPER_2_NC_TRACE_SILK]  114.35,26.67 0 bottom
LED-PWR3  JUMPER-SMT_2_NC_TRACE_SILK  [SMT-JUMPER_2_NC_TRACE_SILK]  14.38,112.22 180 bottom
LED-PWR4  JUMPER-SMT_2_NC_TRACE_SILK  [SMT-JUMPER_2_NC_TRACE_SILK]  52.89,112.22 180 bottom
LED-PWR5  JUMPER-SMT_2_NC_TRACE_SILK  [SMT-JUMPER_2_NC_TRACE_SILK]  91.39,112.22 180 bottom
LED_0  Green  [LED-0603]  39.88,63.08 90 top
LED_1  Yellow  [LED-0603]  37.34,63.08 90 top
LED_2  Green  [LED-0603]  78.39,63.08 90 top
LED_3  Yellow  [LED-0603]  75.85,63.08 90 top
LED_4  Green  [LED-0603]  116.89,63.08 90 top
LED_5  Yellow  [LED-0603]  114.35,63.08 90 top
LED_6  Green  [LED-0603]  11.84,75.81 270 top
LED_7  Yellow  [LED-0603]  14.38,75.81 270 top
LED_8  Green  [LED-0603]  50.35,75.81 270 top
LED_9  Yellow  [LED-0603]  52.89,75.81 270 top
LED_10  Green  [LED-0603]  88.85,75.81 270 top
LED_11  Yellow  [LED-0603]  91.39,75.81 270 top
LINK_ST  Blue  [LED-0603]  34.8,63.08 90 top
LINK_ST1  Blue  [LED-0603]  73.31,63.08 90 top
LINK_ST2  Blue  [LED-0603]  111.81,63.08 90 top
LINK_ST3  Blue  [LED-0603]  16.92,75.81 270 top
LINK_ST4  Blue  [LED-0603]  55.43,75.81 270 top
LINK_ST5  Blue  [LED-0603]  93.93,75.81 270 top
LOGO1  SFE_LOGO_NAME_FLAME.2_INCH  [SFE_LOGO_NAME_FLAME_.2]  26.8,45.21 0 bottom
LOGO2  OSHW-LOGOMINI  [OSHW-LOGO-MINI]  51.53,57.53 0 top
LOGO3  OSHW-LOGOMINI  [OSHW-LOGO-MINI]  13.02,57.53 0 top
LOGO4  SFE_LOGO_NAME_FLAME.2_INCH  [SFE_LOGO_NAME_FLAME_.2]  65.31,45.21 0 bottom
LOGO5  OSHW-LOGOMINI  [OSHW-LOGO-MINI]  90.03,57.53 0 top
LOGO6  SFE_LOGO_NAME_FLAME.2_INCH  [SFE_LOGO_NAME_FLAME_.2]  103.81,45.21 0 bottom
LOGO7  OSHW-LOGOMINI  [OSHW-LOGO-MINI]  38.7,81.36 180 top
LOGO8  SFE_LOGO_NAME_FLAME.2_INCH  [SFE_LOGO_NAME_FLAME_.2]  24.92,93.68 180 bottom
LOGO9  OSHW-LOGOMINI  [OSHW-LOGO-MINI]  77.21,81.36 180 top
LOGO10  SFE_LOGO_NAME_FLAME.2_INCH  [SFE_LOGO_NAME_FLAME_.2]  63.43,93.68 180 bottom
LOGO11  OSHW-LOGOMINI  [OSHW-LOGO-MINI]  115.71,81.36 180 top
LOGO12  SFE_LOGO_NAME_FLAME.2_INCH  [SFE_LOGO_NAME_FLAME_.2]  101.94,93.68 180 bottom
MEAS  JUMPER-COMBO_2_NC_TRACE  [COMBO-JUMPER_2_NC_TRACE]  9.83,14.22 90 bottom
MEAS1  JUMPER-COMBO_2_NC_TRACE  [COMBO-JUMPER_2_NC_TRACE]  48.34,14.22 90 bottom
MEAS2  JUMPER-COMBO_2_NC_TRACE  [COMBO-JUMPER_2_NC_TRACE]  86.84,14.22 90 bottom
MEAS3  JUMPER-COMBO_2_NC_TRACE  [COMBO-JUMPER_2_NC_TRACE]  41.89,124.67 270 bottom
MEAS4  JUMPER-COMBO_2_NC_TRACE  [COMBO-JUMPER_2_NC_TRACE]  80.4,124.67 270 bottom
MEAS5  JUMPER-COMBO_2_NC_TRACE  [COMBO-JUMPER_2_NC_TRACE]  118.9,124.67 270 bottom
MS_SEL  [SMT-JUMPER_2_NO_SILK]  14.48,20.32 0 bottom
MS_SEL1  [SMT-JUMPER_2_NO_SILK]  52.99,20.32 0 bottom
MS_SEL2  [SMT-JUMPER_2_NO_SILK]  91.49,20.32 0 bottom
MS_SEL3  [SMT-JUMPER_2_NO_SILK]  37.24,118.57 180 bottom
MS_SEL4  [SMT-JUMPER_2_NO_SILK]  75.75,118.57 180 bottom
MS_SEL5  [SMT-JUMPER_2_NO_SILK]  114.25,118.57 180 bottom
PWR  Red  [LED-0603]  42.42,63.08 90 top
PWR1  Red  [LED-0603]  80.93,63.08 90 top
PWR2  Red  [LED-0603]  119.43,63.08 90 top
PWR3  Red  [LED-0603]  9.3,75.81 270 top
PWR4  Red  [LED-0603]  47.81,75.81 270 top
PWR5  Red  [LED-0603]  86.31,75.81 270 top
Q1  220mA/50V/3.5Ω  [SOT23-3]  19.32,8.2 90 top
Q2  20V/4.2A/52mΩ/1.4W  [SOT23-3]  14.07,8.12 270 top
Q3  20V/4.2A/52mΩ/1.4W  [SOT23-3]  52.58,8.12 270 top
Q4  220mA/50V/3.5Ω  [SOT23-3]  57.83,8.2 90 top
Q5  20V/4.2A/52mΩ/1.4W  [SOT23-3]  91.08,8.12 270 top
Q6  220mA/50V/3.5Ω  [SOT23-3]  96.34,8.2 90 top
Q7  20V/4.2A/52mΩ/1.4W  [SOT23-3]  37.65,130.77 90 top
Q8  220mA/50V/3.5Ω  [SOT23-3]  32.39,130.69 270 top
Q9  20V/4.2A/52mΩ/1.4W  [SOT23-3]  76.15,130.77 90 top
Q10  220mA/50V/3.5Ω  [SOT23-3]  70.9,130.69 270 top
Q11  20V/4.2A/52mΩ/1.4W  [SOT23-3]  114.66,130.77 90 top
Q12  220mA/50V/3.5Ω  [SOT23-3]  109.41,130.69 270 top
R1  49.9  [0603]  25.06,41.6 270 top
R2  49.9  [0603]  30.29,39.28 180 top
R3  5.1k  [0402-TIGHT]  26.43,41.6 90 top
R4  5.1k  [0402-TIGHT]  30.36,40.46 180 top
R5  10.2k  [0402-TIGHT]  27.67,39.31 0 top
R6  10.2k  [0402-TIGHT]  27.15,38.39 0 top
R7  10k  [0603]  10.94,8.06 270 top
R8  10k  [0603]  30.4,12.27 0 top
R9  1k  [0402-TIGHT]  39.88,26.67 180 top
R10  1.5k  [0603]  19.63,32.2 180 top
R11  1k  [0402-TIGHT]  39.88,50.8 90 top
R12  4.7k  [0402-TIGHT]  10.67,25.4 180 top
R13  4.7k  [0402-TIGHT]  10.67,24.13 180 top
R14  4.7k  [0402-TIGHT]  10.67,22.86 180 top
R15  4.7k  [0402-TIGHT]  10.67,21.59 180 top
R16  4.7k  [0402-TIGHT]  30.99,17.78 180 top
R17  4.7k  [0402-TIGHT]  39.88,29.21 0 top
R18  4.7k  [0402-TIGHT]  39.88,34.29 0 top
R19  4.7k  [0402-TIGHT]  39.88,31.75 0 top
R20  1k  [0402-TIGHT]  37.34,50.8 90 top
R21  1k  [0402-TIGHT]  36.07,50.8 90 top
R22  10k  [0603]  19.32,5.4 0 top
R23  100Ω  [0603]  23.38,48.6 90 top
R24  1.5k  [0603]  14.48,34.29 180 top
R25  4.7k  [0402-TIGHT]  19.05,30.86 180 top
R26  100  [0603]  16.51,8.13 270 top
R27  10k  [0603]  33.53,45.72 90 top
R28  100k  [0402-TIGHT]  32.26,45.72 270 top
R29  100Ω  [0603]  22.55,6.04 90 top
R30  10k  [0603]  57.83,5.4 0 top
R31  10k  [0603]  49.45,8.06 270 top
R32  10k  [0603]  68.91,12.27 0 top
R33  1k  [0402-TIGHT]  78.39,26.67 180 top
R34  49.9  [0603]  68.8,39.28 180 top
R35  49.9  [0603]  63.57,41.6 270 top
R36  1.5k  [0603]  58.14,32.2 180 top
R37  1k  [0402-TIGHT]  78.39,50.8 90 top
R38  4.7k  [0402-TIGHT]  49.18,25.4 180 top
R39  4.7k  [0402-TIGHT]  49.18,24.13 180 top
R40  4.7k  [0402-TIGHT]  49.18,22.86 180 top
R41  4.7k  [0402-TIGHT]  49.18,21.59 180 top
R42  4.7k  [0402-TIGHT]  69.5,17.78 180 top
R43  4.7k  [0402-TIGHT]  78.39,29.21 0 top
R44  1k  [0402-TIGHT]  75.85,50.8 90 top
R45  4.7k  [0402-TIGHT]  78.39,34.29 0 top
R46  1k  [0402-TIGHT]  74.58,50.8 90 top
R47  4.7k  [0402-TIGHT]  78.39,31.75 0 top
R48  10.2k  [0402-TIGHT]  66.18,39.31 0 top
R49  10.2k  [0402-TIGHT]  65.66,38.39 0 top
R50  5.1k  [0402-TIGHT]  68.87,40.46 180 top
R51  5.1k  [0402-TIGHT]  64.94,41.6 90 top
R52  100Ω  [0603]  61.89,48.6 90 top
R53  1.5k  [0603]  52.99,34.29 180 top
R54  4.7k  [0402-TIGHT]  57.56,30.86 180 top
R55  100  [0603]  55.02,8.13 270 top
R56  10k  [0603]  72.04,45.72 90 top
R57  100k  [0402-TIGHT]  70.77,45.72 270 top
R58  100Ω  [0603]  61.06,6.04 90 top
R59  10k  [0603]  96.33,5.4 0 top
R60  10k  [0603]  87.96,8.06 270 top
R61  10k  [0603]  107.41,12.27 0 top
R62  1k  [0402-TIGHT]  116.89,26.67 180 top
R63  49.9  [0603]  107.31,39.28 180 top
R64  49.9  [0603]  102.08,41.6 270 top
R65  1.5k  [0603]  96.65,32.2 180 top
R66  1k  [0402-TIGHT]  116.89,50.8 90 top
R67  4.7k  [0402-TIGHT]  87.68,25.4 180 top
R68  4.7k  [0402-TIGHT]  87.68,24.13 180 top
R69  4.7k  [0402-TIGHT]  87.68,22.86 180 top
R70  4.7k  [0402-TIGHT]  87.68,21.59 180 top
R71  4.7k  [0402-TIGHT]  108,17.78 180 top
R72  4.7k  [0402-TIGHT]  116.89,29.21 0 top
R73  1k  [0402-TIGHT]  114.35,50.8 90 top
R74  4.7k  [0402-TIGHT]  116.89,34.29 0 top
R75  1k  [0402-TIGHT]  113.08,50.8 90 top
R76  4.7k  [0402-TIGHT]  116.89,31.75 0 top
R77  10.2k  [0402-TIGHT]  104.69,39.31 0 top
R78  10.2k  [0402-TIGHT]  104.16,38.39 0 top
R79  5.1k  [0402-TIGHT]  107.37,40.46 180 top
R80  5.1k  [0402-TIGHT]  103.45,41.6 90 top
R81  100Ω  [0603]  100.4,48.6 90 top
R82  1.5k  [0603]  91.49,34.29 180 top
R83  4.7k  [0402-TIGHT]  96.07,30.86 180 top
R84  100  [0603]  93.53,8.13 270 top
R85  10k  [0603]  110.54,45.72 90 top
R86  100k  [0402-TIGHT]  109.27,45.72 270 top
R87  100Ω  [0603]  99.57,6.04 90 top
R88  10k  [0603]  32.4,133.49 180 top
R89  10k  [0603]  40.78,130.82 90 top
R90  10k  [0603]  21.32,126.62 180 top
R91  1k  [0402-TIGHT]  11.84,112.22 0 top
R92  49.9  [0603]  21.42,99.61 0 top
R93  49.9  [0603]  26.65,97.29 90 top
R94  1.5k  [0603]  32.08,106.69 0 top
R95  1k  [0402-TIGHT]  11.84,88.09 270 top
R96  4.7k  [0402-TIGHT]  41.05,113.49 0 top
R97  4.7k  [0402-TIGHT]  41.05,114.76 0 top
R98  4.7k  [0402-TIGHT]  41.05,116.03 0 top
R99  4.7k  [0402-TIGHT]  41.05,117.3 0 top
R100  4.7k  [0402-TIGHT]  20.73,121.11 0 top
R101  4.7k  [0402-TIGHT]  11.84,109.68 180 top
R102  1k  [0402-TIGHT]  14.38,88.09 270 top
R103  4.7k  [0402-TIGHT]  11.84,104.6 180 top
R104  1k  [0402-TIGHT]  15.65,88.09 270 top
R105  4.7k  [0402-TIGHT]  11.84,107.14 180 top
R106  10.2k  [0402-TIGHT]  24.05,99.58 180 top
R107  10.2k  [0402-TIGHT]  24.57,100.5 180 top
R108  5.1k  [0402-TIGHT]  21.36,98.43 0 top
R109  5.1k  [0402-TIGHT]  25.29,97.29 270 top
R110  100Ω  [0603]  28.34,90.29 270 top
R111  1.5k  [0603]  37.24,104.6 0 top
R112  4.7k  [0402-TIGHT]  32.67,108.03 0 top
R113  100  [0603]  35.21,130.76 90 top
R114  10k  [0603]  18.19,93.17 270 top
R115  100k  [0402-TIGHT]  19.46,93.17 90 top
R116  100Ω  [0603]  29.17,132.85 270 top
R117  10k  [0603]  70.91,133.49 180 top
R118  10k  [0603]  79.28,130.82 90 top
R119  10k  [0603]  59.83,126.62 180 top
R120  1k  [0402-TIGHT]  50.35,112.22 0 top
R121  49.9  [0603]  59.93,99.61 0 top
R122  49.9  [0603]  65.16,97.29 90 top
R123  1.5k  [0603]  70.59,106.69 0 top
R124  1k  [0402-TIGHT]  50.35,88.09 270 top
R125  4.7k  [0402-TIGHT]  79.56,113.49 0 top
R126  4.7k  [0402-TIGHT]  79.56,114.76 0 top
R127  4.7k  [0402-TIGHT]  79.56,116.03 0 top
R128  4.7k  [0402-TIGHT]  79.56,117.3 0 top
R129  4.7k  [0402-TIGHT]  59.24,121.11 0 top
R130  4.7k  [0402-TIGHT]  50.35,109.68 180 top
R131  1k  [0402-TIGHT]  52.89,88.09 270 top
R132  4.7k  [0402-TIGHT]  50.35,104.6 180 top
R133  1k  [0402-TIGHT]  54.16,88.09 270 top
R134  4.7k  [0402-TIGHT]  50.35,107.14 180 top
R135  10.2k  [0402-TIGHT]  62.55,99.58 180 top
R136  10.2k  [0402-TIGHT]  63.08,100.5 180 top
R137  5.1k  [0402-TIGHT]  59.87,98.43 0 top
R138  5.1k  [0402-TIGHT]  63.79,97.29 270 top
R139  100Ω  [0603]  66.84,90.29 270 top
R140  1.5k  [0603]  75.75,104.6 0 top
R141  4.7k  [0402-TIGHT]  71.17,108.03 0 top
R142  100  [0603]  73.71,130.76 90 top
R143  10k  [0603]  56.7,93.17 270 top
R144  100k  [0402-TIGHT]  57.97,93.17 90 top
R145  100Ω  [0603]  67.67,132.85 270 top
R146  10k  [0603]  109.41,133.49 180 top
R147  10k  [0603]  117.79,130.82 90 top
R148  10k  [0603]  98.33,126.62 180 top
R149  1k  [0402-TIGHT]  88.85,112.22 0 top
R150  49.9  [0603]  98.44,99.61 0 top
R151  49.9  [0603]  103.67,97.29 90 top
R152  1.5k  [0603]  109.1,106.69 0 top
R153  1k  [0402-TIGHT]  88.85,88.09 270 top
R154  4.7k  [0402-TIGHT]  118.06,113.49 0 top
R155  4.7k  [0402-TIGHT]  118.06,114.76 0 top
R156  4.7k  [0402-TIGHT]  118.06,116.03 0 top
R157  4.7k  [0402-TIGHT]  118.06,117.3 0 top
R158  4.7k  [0402-TIGHT]  97.74,121.11 0 top
R159  4.7k  [0402-TIGHT]  88.85,109.68 180 top
R160  1k  [0402-TIGHT]  91.39,88.09 270 top
R161  4.7k  [0402-TIGHT]  88.85,104.6 180 top
R162  1k  [0402-TIGHT]  92.66,88.09 270 top
R163  4.7k  [0402-TIGHT]  88.85,107.14 180 top
R164  10.2k  [0402-TIGHT]  101.06,99.58 180 top
R165  10.2k  [0402-TIGHT]  101.58,100.5 180 top
R166  5.1k  [0402-TIGHT]  98.37,98.43 0 top
R167  5.1k  [0402-TIGHT]  102.3,97.29 270 top
R168  100Ω  [0603]  105.35,90.29 270 top
R169  1.5k  [0603]  114.25,104.6 0 top
R170  4.7k  [0402-TIGHT]  109.68,108.03 0 top
R171  100  [0603]  112.22,130.76 90 top
R172  10k  [0603]  95.2,93.17 270 top
R173  100k  [0402-TIGHT]  96.47,93.17 90 top
R174  100Ω  [0603]  106.18,132.85 270 top
S1  RESET  [TACTILE_SWITCH_SMD_5.2MM]  38.73,43.94 270 top
S2  RESET  [TACTILE_SWITCH_SMD_5.2MM]  77.24,43.94 270 top
S3  RESET  [TACTILE_SWITCH_SMD_5.2MM]  115.75,43.94 270 top
S4  RESET  [TACTILE_SWITCH_SMD_5.2MM]  12.98,94.95 90 top
S5  RESET  [TACTILE_SWITCH_SMD_5.2MM]  51.49,94.95 90 top
S6  RESET  [TACTILE_SWITCH_SMD_5.2MM]  90,94.95 90 top
SHLD  [SMT-JUMPER_3_1-NC_TRACE_SILK]  10.36,53.5 90 bottom
SHLD1  [SMT-JUMPER_3_1-NC_TRACE_SILK]  48.87,53.5 90 bottom
SHLD2  [SMT-JUMPER_3_1-NC_TRACE_SILK]  87.37,53.5 90 bottom
SHLD3  [SMT-JUMPER_3_1-NC_TRACE_SILK]  41.36,85.39 270 bottom
SHLD4  [SMT-JUMPER_3_1-NC_TRACE_SILK]  79.87,85.39 270 bottom
SHLD5  [SMT-JUMPER_3_1-NC_TRACE_SILK]  118.37,85.39 270 bottom
SPI  [TP_15TH]  34.88,27.92 0 top
SPI1  [TP_15TH]  73.39,27.92 0 top
SPI2  [TP_15TH]  111.9,27.92 0 top
SPI3  [TP_15TH]  16.83,110.97 180 top
SPI4  [TP_15TH]  55.34,110.97 180 top
SPI5  [TP_15TH]  93.85,110.97 180 top
SPI_CFG0  [SMT-JUMPER_2_NO_SILK]  33.02,17.53 0 bottom
SPI_CFG1  [SMT-JUMPER_2_NO_SILK]  14.48,17.78 0 bottom
SPI_CFG2  [SMT-JUMPER_2_NO_SILK]  52.99,17.78 0 bottom
SPI_CFG3  [SMT-JUMPER_2_NO_SILK]  71.53,17.53 0 bottom
SPI_CFG4  [SMT-JUMPER_2_NO_SILK]  91.49,17.78 0 bottom
SPI_CFG5  [SMT-JUMPER_2_NO_SILK]  110.04,17.53 0 bottom
SPI_CFG6  [SMT-JUMPER_2_NO_SILK]  37.24,121.11 180 bottom
SPI_CFG7  [SMT-JUMPER_2_NO_SILK]  18.7,121.36 180 bottom
SPI_CFG8  [SMT-JUMPER_2_NO_SILK]  75.75,121.11 180 bottom
SPI_CFG9  [SMT-JUMPER_2_NO_SILK]  57.2,121.36 180 bottom
SPI_CFG10  [SMT-JUMPER_2_NO_SILK]  114.25,121.11 180 bottom
SPI_CFG11  [SMT-JUMPER_2_NO_SILK]  95.71,121.36 180 bottom
SWPD  [SMT-JUMPER_2_NO_SILK]  14.48,22.86 0 bottom
SWPD1  [SMT-JUMPER_2_NO_SILK]  52.99,22.86 0 bottom
SWPD2  [SMT-JUMPER_2_NO_SILK]  91.49,22.86 0 bottom
SWPD3  [SMT-JUMPER_2_NO_SILK]  37.24,116.03 180 bottom
SWPD4  [SMT-JUMPER_2_NO_SILK]  75.75,116.03 180 bottom
SWPD5  [SMT-JUMPER_2_NO_SILK]  114.25,116.03 180 bottom
T1  WE-STST  [WE_STST_TRANSFORMER_1:1_SMD_3.2X4.7MM_74930030]  26.96,49.84 90 top
T2  WE-STST  [WE_STST_TRANSFORMER_1:1_SMD_3.2X4.7MM_74930030]  65.47,49.84 90 top
T3  WE-STST  [WE_STST_TRANSFORMER_1:1_SMD_3.2X4.7MM_74930030]  103.97,49.84 90 top
T4  WE-STST  [WE_STST_TRANSFORMER_1:1_SMD_3.2X4.7MM_74930030]  24.76,89.05 270 top
T5  WE-STST  [WE_STST_TRANSFORMER_1:1_SMD_3.2X4.7MM_74930030]  63.27,89.05 270 top
T6  WE-STST  [WE_STST_TRANSFORMER_1:1_SMD_3.2X4.7MM_74930030]  101.78,89.05 270 top
TP1  TEST-POINT3X4  [PAD.03X.04]  39.86,15 0 bottom
TP2  TEST-POINT3X4  [PAD.03X.04]  78.37,15 0 bottom
TP3  TEST-POINT3X4  [PAD.03X.04]  116.87,15 0 bottom
TP4  TEST-POINT3X4  [PAD.03X.04]  11.86,123.89 180 bottom
TP5  TEST-POINT3X4  [PAD.03X.04]  50.37,123.89 180 bottom
TP6  TEST-POINT3X4  [PAD.03X.04]  88.87,123.89 180 bottom
TX2P1  [SMT-JUMPER_2_NO_SILK]  52.99,25.4 0 bottom
TX2P2  [SMT-JUMPER_2_NO_SILK]  91.49,25.4 0 bottom
TX2P3  [SMT-JUMPER_2_NO_SILK]  37.24,113.49 180 bottom
TX2P4  [SMT-JUMPER_2_NO_SILK]  14.48,25.4 0 bottom
TX2P5  [SMT-JUMPER_2_NO_SILK]  75.75,113.49 180 bottom
TX2P6  [SMT-JUMPER_2_NO_SILK]  114.25,113.49 180 bottom
U1  ADIN1110  [LFCSP-40]  25.91,33.78 180 top
U2  EEPROM  [SO08]  28.4,8.27 270 top
U3  3.3V  [SOT23-5]  17.41,13.53 270 top
U4  WE-TVS  [WE_TVS_1.0X1.2MM]  28.16,42.37 0 top
U5  EEPROM  [SO08]  66.91,8.27 270 top
U6  3.3V  [SOT23-5]  55.92,13.53 270 top
U7  ADIN1110  [LFCSP-40]  64.42,33.78 180 top
U8  WE-TVS  [WE_TVS_1.0X1.2MM]  66.67,42.37 0 top
U9  EEPROM  [SO08]  105.41,8.27 270 top
U10  3.3V  [SOT23-5]  94.43,13.53 270 top
U11  ADIN1110  [LFCSP-40]  102.92,33.78 180 top
U12  WE-TVS  [WE_TVS_1.0X1.2MM]  105.18,42.37 0 top
U13  EEPROM  [SO08]  23.32,130.62 90 top
U14  3.3V  [SOT23-5]  34.3,125.36 90 top
U15  ADIN1110  [LFCSP-40]  25.81,105.11 0 top
U16  WE-TVS  [WE_TVS_1.0X1.2MM]  23.56,96.51 180 top
U17  EEPROM  [SO08]  61.83,130.62 90 top
U18  3.3V  [SOT23-5]  72.81,125.36 90 top
U19  ADIN1110  [LFCSP-40]  64.32,105.11 0 top
U20  WE-TVS  [WE_TVS_1.0X1.2MM]  62.06,96.51 180 top
U21  EEPROM  [SO08]  100.33,130.62 90 top
U22  3.3V  [SOT23-5]  111.32,125.36 90 top
U23  ADIN1110  [LFCSP-40]  102.82,105.11 0 top
U24  WE-TVS  [WE_TVS_1.0X1.2MM]  100.57,96.51 180 top
U$1  [#RESET#0]  35.56,44.07 90 top
U$2  [INDUSTRIAL0]  25.65,23.11 0 top
U$3  [ETHERNET0]  32.96,20.81 0 top
U$4  [ADIN11100]  25.52,18.57 0 top
U$5  [SFE_LOGO_FLAME_.1]  25.4,25.15 0 top
U$6  [#PWR#19]  40.49,26.7 0 bottom
U$7  [PWR0]  42.39,59.85 90 top
U$8  [SHLD11]  8.61,53.45 270 bottom
U$9  [#EWP#18]  28.32,14.22 0 bottom
U$10  [#LED0#20]  40.7,29.19 0 bottom
U$11  [#GND#16]  10.31,49.95 270 bottom
U$12  [#CAP#17]  10.41,57.1 270 bottom
U$13  [##TX2P4_EN##4]  19.53,25.35 0 bottom
U$14  [#SPI_CFG1#0]  19.05,17.78 0 bottom
U$15  [#MS_SEL#2]  18.54,20.32 0 bottom
U$16  [#SPI_CFG0#0]  37.72,17.53 0 bottom
U$17  [MICROMOD_LOGO_.35]  51.52,63.04 0 top
U$18  [MICROMOD_LOGO_.35]  51.68,62.97 0 bottom
U$19  [INDUSTRIAL0]  26.29,42.42 0 bottom
U$20  [ETHERNET0]  26.22,38.44 0 bottom
U$21  [ADIN11100]  26.41,36.48 0 bottom
U$22  [##SWPD_EN##4]  19.21,22.86 0 bottom
U$23  [LED_03]  39.88,59.52 90 top
U$24  [FUNCTION0]  13.02,61.09 0 bottom
U$25  [LED_14]  37.34,59.65 90 top
U$26  [FUNCTION0]  13.26,61.09 0 top
U$27  [LINK_ST15]  34.8,58.89 90 top
U$28  [#MEAS#3]  8.07,16.99 270 bottom
U$29  [#LED1#21]  40.57,34.31 0 bottom
U$30  [TWO_WIRE3]  26.19,40.36 0 bottom
U$31  [#LINKST#2]  41.21,31.74 0 bottom
U$32  [TWO_WIRE3]  20.46,20.85 0 top
U$33  [#MEAS#3]  46.58,16.99 270 bottom
U$34  [PWR0]  80.9,59.85 90 top
U$35  [FUNCTION0]  51.77,61.09 0 top
U$36  [INDUSTRIAL0]  64.16,23.11 0 top
U$37  [MICROMOD_LOGO_.35]  13.17,62.97 0 bottom
U$38  [ETHERNET0]  71.47,20.81 0 top
U$39  [ADIN11100]  64.03,18.57 0 top
U$40  [SFE_LOGO_FLAME_.1]  63.91,25.15 0 top
U$41  [#RESET#0]  74.07,44.07 90 top
U$42  [SHLD11]  47.12,53.45 270 bottom
U$43  [#SPI_CFG1#0]  57.56,17.78 0 bottom
U$44  [#MS_SEL#2]  57.05,20.32 0 bottom
U$45  [#SPI_CFG0#0]  76.23,17.53 0 bottom
U$46  [INDUSTRIAL0]  64.8,42.42 0 bottom
U$47  [ETHERNET0]  64.73,38.44 0 bottom
U$48  [ADIN11100]  64.92,36.48 0 bottom
U$49  [FUNCTION0]  51.53,61.09 0 bottom
U$50  [LED_03]  78.39,59.52 90 top
U$51  [LED_14]  75.85,59.65 90 top
U$52  [LINK_ST15]  73.31,58.89 90 top
U$53  [#GND#16]  48.82,49.95 270 bottom
U$54  [#CAP#17]  48.92,57.1 270 bottom
U$55  [#EWP#18]  66.83,14.22 0 bottom
U$56  [#PWR#19]  79,26.7 0 bottom
U$57  [#LED0#20]  79.21,29.19 0 bottom
U$58  [#LED1#21]  79.08,34.31 0 bottom
U$59  [#LINKST#2]  79.72,31.74 0 bottom
U$60  [TWO_WIRE3]  64.7,40.36 0 bottom
U$61  [TWO_WIRE3]  58.97,20.85 0 top
U$62  [##TX2P4_EN##4]  58.04,25.35 0 bottom
U$63  [MICROMOD_LOGO_.35]  13.01,63.04 0 top
U$64  [##SWPD_EN##4]  57.72,22.86 0 bottom
U$65  [MICROMOD_LOGO_.35]  90.03,63.04 0 top
U$66  [MICROMOD_LOGO_.35]  90.19,62.97 0 bottom
U$67  [#MEAS#3]  85.09,16.99 270 bottom
U$68  [PWR0]  119.4,59.85 90 top
U$69  [FUNCTION0]  90.28,61.09 0 top
U$70  [INDUSTRIAL0]  102.67,23.11 0 top
U$71  [ETHERNET0]  109.98,20.81 0 top
U$72  [ADIN11100]  102.54,18.57 0 top
U$73  [SFE_LOGO_FLAME_.1]  102.42,25.15 0 top
U$74  [#RESET#0]  112.58,44.07 90 top
U$75  [SHLD11]  85.62,53.45 270 bottom
U$76  [#SPI_CFG1#0]  96.07,17.78 0 bottom
U$77  [#MS_SEL#2]  95.56,20.32 0 bottom
U$78  [#SPI_CFG0#0]  114.73,17.53 0 bottom
U$79  [INDUSTRIAL0]  103.3,42.42 0 bottom
U$80  [ETHERNET0]  103.23,38.44 0 bottom
U$81  [ADIN11100]  103.43,36.48 0 bottom
U$82  [FUNCTION0]  90.04,61.09 0 bottom
U$83  [LED_03]  116.89,59.52 90 top
U$84  [LED_14]  114.35,59.65 90 top
U$85  [LINK_ST15]  111.81,58.89 90 top
U$86  [#GND#16]  87.32,49.95 270 bottom
U$87  [#CAP#17]  87.42,57.1 270 bottom
U$88  [#EWP#18]  105.34,14.22 0 bottom
U$89  [#PWR#19]  117.5,26.7 0 bottom
U$90  [#LED0#20]  117.71,29.19 0 bottom
U$91  [#LED1#21]  117.58,34.31 0 bottom
U$92  [#LINKST#2]  118.22,31.74 0 bottom
U$93  [TWO_WIRE3]  103.2,40.36 0 bottom
U$94  [TWO_WIRE3]  97.47,20.85 0 top
U$95  [##TX2P4_EN##4]  96.55,25.35 0 bottom
U$96  [##SWPD_EN##4]  96.23,22.86 0 bottom
U$97  [MICROMOD_LOGO_.35]  38.71,75.85 180 top
U$98  [MICROMOD_LOGO_.35]  38.54,75.92 180 bottom
U$99  [#MEAS#3]  43.64,121.9 90 bottom
U$100  [PWR0]  9.33,79.04 270 top
U$101  [FUNCTION0]  38.45,77.8 180 top
U$102  [INDUSTRIAL0]  26.06,115.78 180 top
U$103  [ETHERNET0]  18.75,118.08 180 top
U$104  [ADIN11100]  26.2,120.32 180 top
U$105  [SFE_LOGO_FLAME_.1]  26.32,113.74 180 top
U$106  [#RESET#0]  16.16,94.82 270 top
U$107  [SHLD11]  43.11,85.44 90 bottom
U$108  [#SPI_CFG1#0]  32.67,121.11 180 bottom
U$109  [#MS_SEL#2]  33.17,118.57 180 bottom
U$110  [#SPI_CFG0#0]  14,121.36 180 bottom
U$111  [INDUSTRIAL0]  25.43,96.47 180 bottom
U$112  [ETHERNET0]  25.5,100.45 180 bottom
U$113  [ADIN11100]  25.3,102.41 180 bottom
U$114  [FUNCTION0]  38.69,77.8 180 bottom
U$115  [LED_03]  11.84,79.37 270 top
U$116  [LED_14]  14.38,79.24 270 top
U$117  [LINK_ST15]  16.92,80 270 top
U$118  [#GND#16]  41.41,88.94 90 bottom
U$119  [#CAP#17]  41.31,81.79 90 bottom
U$120  [#EWP#18]  23.4,124.67 180 bottom
U$121  [#PWR#19]  11.23,112.19 180 bottom
U$122  [#LED0#20]  11.02,109.7 180 bottom
U$123  [#LED1#21]  11.15,104.58 180 bottom
U$124  [#LINKST#2]  10.51,107.15 180 bottom
U$125  [TWO_WIRE3]  25.53,98.53 180 bottom
U$126  [TWO_WIRE3]  31.26,118.04 180 top
U$127  [##TX2P4_EN##4]  32.19,113.54 180 bottom
U$128  [##SWPD_EN##4]  32.51,116.03 180 bottom
U$129  [MICROMOD_LOGO_.35]  77.21,75.85 180 top
U$130  [MICROMOD_LOGO_.35]  77.05,75.92 180 bottom
U$131  [#MEAS#3]  82.15,121.9 90 bottom
U$132  [PWR0]  47.84,79.04 270 top
U$133  [FUNCTION0]  76.96,77.8 180 top
U$134  [INDUSTRIAL0]  64.57,115.78 180 top
U$135  [ETHERNET0]  57.26,118.08 180 top
U$136  [ADIN11100]  64.7,120.32 180 top
U$137  [SFE_LOGO_FLAME_.1]  64.82,113.74 180 top
U$138  [#RESET#0]  54.66,94.82 270 top
U$139  [SHLD11]  81.62,85.44 90 bottom
U$140  [#SPI_CFG1#0]  71.17,121.11 180 bottom
U$141  [#MS_SEL#2]  71.68,118.57 180 bottom
U$142  [#SPI_CFG0#0]  52.5,121.36 180 bottom
U$143  [INDUSTRIAL0]  63.93,96.47 180 bottom
U$144  [ETHERNET0]  64,100.45 180 bottom
U$145  [ADIN11100]  63.81,102.41 180 bottom
U$146  [FUNCTION0]  77.2,77.8 180 bottom
U$147  [LED_03]  50.35,79.37 270 top
U$148  [LED_14]  52.89,79.24 270 top
U$149  [LINK_ST15]  55.43,80 270 top
U$150  [#GND#16]  79.92,88.94 90 bottom
U$151  [#CAP#17]  79.82,81.79 90 bottom
U$152  [#EWP#18]  61.9,124.67 180 bottom
U$153  [#PWR#19]  49.74,112.19 180 bottom
U$154  [#LED0#20]  49.53,109.7 180 bottom
U$155  [#LED1#21]  49.66,104.58 180 bottom
U$156  [#LINKST#2]  49.02,107.15 180 bottom
U$157  [TWO_WIRE3]  64.04,98.53 180 bottom
U$158  [TWO_WIRE3]  69.77,118.04 180 top
U$159  [##TX2P4_EN##4]  70.69,113.54 180 bottom
U$160  [##SWPD_EN##4]  71.01,116.03 180 bottom
U$161  [MICROMOD_LOGO_.35]  115.72,75.85 180 top
U$162  [MICROMOD_LOGO_.35]  115.56,75.92 180 bottom
U$163  [#MEAS#3]  120.66,121.9 90 bottom
U$164  [PWR0]  86.35,79.04 270 top
U$165  [FUNCTION0]  115.47,77.8 180 top
U$166  [INDUSTRIAL0]  103.08,115.78 180 top
U$167  [ETHERNET0]  95.77,118.08 180 top
U$168  [ADIN11100]  103.21,120.32 180 top
U$169  [SFE_LOGO_FLAME_.1]  103.33,113.74 180 top
U$170  [#RESET#0]  93.17,94.82 270 top
U$171  [SHLD11]  120.12,85.44 90 bottom
U$172  [#SPI_CFG1#0]  109.68,121.11 180 bottom
U$173  [#MS_SEL#2]  110.19,118.57 180 bottom
U$174  [#SPI_CFG0#0]  91.01,121.36 180 bottom
U$175  [INDUSTRIAL0]  102.44,96.47 180 bottom
U$176  [ETHERNET0]  102.51,100.45 180 bottom
U$177  [ADIN11100]  102.32,102.41 180 bottom
U$178  [FUNCTION0]  115.71,77.8 180 bottom
U$179  [LED_03]  88.85,79.37 270 top
U$180  [LED_14]  91.39,79.24 270 top
U$181  [LINK_ST15]  93.93,80 270 top
U$182  [#GND#16]  118.42,88.94 90 bottom
U$183  [#CAP#17]  118.32,81.79 90 bottom
U$184  [#EWP#18]  100.41,124.67 180 bottom
U$185  [#PWR#19]  88.24,112.19 180 bottom
U$186  [#LED0#20]  88.03,109.7 180 bottom
U$187  [#LED1#21]  88.16,104.58 180 bottom
U$188  [#LINKST#2]  87.52,107.15 180 bottom
U$189  [TWO_WIRE3]  102.54,98.53 180 bottom
U$190  [TWO_WIRE3]  108.27,118.04 180 top
U$191  [##TX2P4_EN##4]  109.2,113.54 180 bottom
U$192  [##SWPD_EN##4]  109.52,116.03 180 bottom
Y1  25MHz  [CRYSTAL-SMD-2.0X1.6MM-WE]  33.4,35.63 90 top
Y2  25MHz  [CRYSTAL-SMD-2.0X1.6MM-WE]  71.91,35.63 90 top
Y3  25MHz  [CRYSTAL-SMD-2.0X1.6MM-WE]  110.41,35.63 90 top
Y4  25MHz  [CRYSTAL-SMD-2.0X1.6MM-WE]  18.32,103.26 270 top
Y5  25MHz  [CRYSTAL-SMD-2.0X1.6MM-WE]  56.83,103.26 270 top
Y6  25MHz  [CRYSTAL-SMD-2.0X1.6MM-WE]  95.33,103.26 270 top

## Library data of the parts
C1 C2 C40 C41 C63 C64 C86 C87 C109 C110 C132 C133 = SparkFun-Capacitors; PROD_ID: CAP-15456
C3 C4 C25 C26 C48 C49 C71 C72 C94 C95 C117 C118 = SparkFun-Capacitors; PROD_ID: CAP-16503
C5 C6 C27 C28 C50 C51 C73 C74 C96 C97 C119 C120 = SparkFun-Capacitors; PROD_ID: CAP-16506
C7 C42 C65 C88 C111 C134 = SparkFun-Capacitors; PROD_ID: CAP-16505
C8 C9 C24 C29 C47 C52 C70 C75 C93 C98 C116 C121 = SparkFun-Capacitors; PROD_ID: CAP-16504
C10 C13 C15 C16 C18 C23 C30 C33 C35 C36 C38 C46 C53 C56 C58 C59 C61 C69 C76 C79 C81 C82 C84 C92 C99 C102 C104 C105 C107 C115 C122 C125 C127 C128 C130 C138 = SparkFun-Capacitors; PROD_ID: CAP-16507
C11 C31 C54 C77 C100 C123 = SparkFun-Capacitors; PROD_ID: CAP-16639
C12 C14 C17 C32 C34 C37 C55 C57 C60 C78 C80 C83 C101 C103 C106 C124 C126 C129 = SparkFun-Capacitors; PROD_ID: CAP-16508
C19 C39 C62 C85 C108 C131 = SparkFun-Capacitors; PROD_ID: CAP-12417
C20 C43 C66 C89 C112 C135 = SparkFun-Capacitors; PROD_ID: CAP-16430
C21 C44 C67 C90 C113 C136 = SparkFun-Capacitors; PROD_ID: CAP-16523
C22 C45 C68 C91 C114 C137 = SparkFun-Capacitors; PROD_ID: CAP-16570; VALUE: 470nF
CIPO CIPO1-CIPO5 COPI COPI1-COPI5 CS CS1-CS5 INT INT1-INT5 SPI SPI1-SPI5 TP1-TP6 = SparkFun-Connectors
E$1-E$4 FD1-FD24 LOGO1-LOGO12 U$5 U$40 U$73 U$105 U$137 U$169 = SparkFun-Aesthetics
E$5 E$6 = SparkFun-Retired
EWP EWP1-EWP5 LED-0 LED-1-LED-11 LED-LINK LED-LINK1-LED-LINK5 LED-PWR LED-PWR1-LED-PWR5 MEAS MEAS1-MEAS5 MS_SEL MS_SEL1-MS_SEL5 SHLD SHLD1-SHLD5 SPI_CFG0 SPI_CFG1-SPI_CFG11 SWPD SWPD1-SWPD5 TX2P1-TX2P6 = SparkFun-Jumpers
J1 J4 J6 J8 J10 J12 = ADIN1110; PROD_ID: CONN-16501
J2 J3 J5 J7 J9 J11 U$17 U$18 U$37 U$63 U$65 U$66 U$97 U$98 U$129 U$130 U$161 U$162 = SparkFun-MicroMod
LED_0 LED_2 LED_4 LED_6 LED_8 LED_10 = SparkFun-LED; PROD_ID: DIO-16512
LED_1 LED_3 LED_5 LED_7 LED_9 LED_11 = SparkFun-LED; PROD_ID: DIO-16514
LINK_ST LINK_ST1-LINK_ST5 = SparkFun-LED; PROD_ID: DIO-16513
PWR PWR1-PWR5 = SparkFun-LED; PROD_ID: DIO-16511
Q1 Q4 Q6 Q8 Q10 Q12 = SparkFun-DiscreteSemi; PROD_ID: TRANS-00830
Q2 Q3 Q5 Q7 Q9 Q11 = SparkFun-DiscreteSemi; PROD_ID: TRANS-14388
R1 R2 R34 R35 R63 R64 R92 R93 R121 R122 R150 R151 = SparkFun-Resistors; PROD_ID: RES-16237
R3 R4 R50 R51 R79 R80 R108 R109 R137 R138 R166 R167 = SparkFun-Resistors; PROD_ID: RES-14340
R5 R6 R48 R49 R77 R78 R106 R107 R135 R136 R164 R165 = SparkFun-Resistors; PROD_ID: RES-16559
R7 R8 R22 R27 R30-R32 R56 R59-R61 R85 R88-R90 R114 R117-R119 R143 R146-R148 R172 = SparkFun-Resistors; PROD_ID: RES-00824
R9 R11 R20 R21 R33 R37 R44 R46 R62 R66 R73 R75 R91 R95 R102 R104 R120 R124 R131 R133 R149 R153 R160 R162 = SparkFun-Resistors; PROD_ID: RES-14342
R10 R24 R36 R53 R65 R82 R94 R111 R123 R140 R152 R169 = SparkFun-Resistors; PROD_ID: RES-08306
R12-R19 R25 R38-R43 R45 R47 R54 R67-R72 R74 R76 R83 R96-R101 R103 R105 R112 R125-R130 R132 R134 R141 R154-R159 R161 R163 R170 = SparkFun-Resistors; PROD_ID: RES-15343
R23 R52 R81 R110 R139 R168 = SparkFun-Resistors; PROD_ID: RES-07863; VALUE: 100
R26 R29 R55 R58 R84 R87 R113 R116 R142 R145 R171 R174 = SparkFun-Resistors; PROD_ID: RES-07863
R28 R57 R86 R115 R144 R173 = SparkFun-Resistors; PROD_ID: RES-13495
S1-S6 = SparkFun-Switches; PROD_ID: SWCH-14139
T1-T6 = ADIN1110; PROD_ID: COMP-16426
U1 U7 U11 U15 U19 U23 = ADIN1110; PROD_ID: IC-16335
U2 U5 U9 U13 U17 U21 = SparkFun-IC-Memory; PROD_ID: IC-14645
U3 U6 U10 U14 U18 U22 = SparkFun-IC-Power; PROD_ID: VREG-12457
U4 U8 U12 U16 U20 U24 = ADIN1110; PROD_ID: DIO-16429
U$1-U$4 U$6-U$16 U$19-U$30 U$32-U$36 U$38 U$39 U$41-U$58 U$60-U$62 U$64 U$67-U$72 U$74-U$91 U$93-U$96 U$99-U$104 U$106-U$123 U$125-U$128 U$131-U$136 U$138-U$155 U$157-U$160 U$163-U$168 U$170-U$187 U$189-U$192 = output
U$31 U$59 U$92 U$124 U$156 U$188 = ADIN1110
Y1-Y6 = SparkFun-Clocks; PROD_ID: XTAL-16515